# Altium PCB 20K Control Board V1.1.PcbDoc (part 1 of 24)
Units mm, origin at the board's own origin, x right, y up, seen from the top; angles counter-clockwise.
Board outline 132 x 260 mm, 4 copper layers (Top Layer, GND, VCC, Bottom Layer); 1384 components, 779 nets, 4515 pads, 1774 vias.
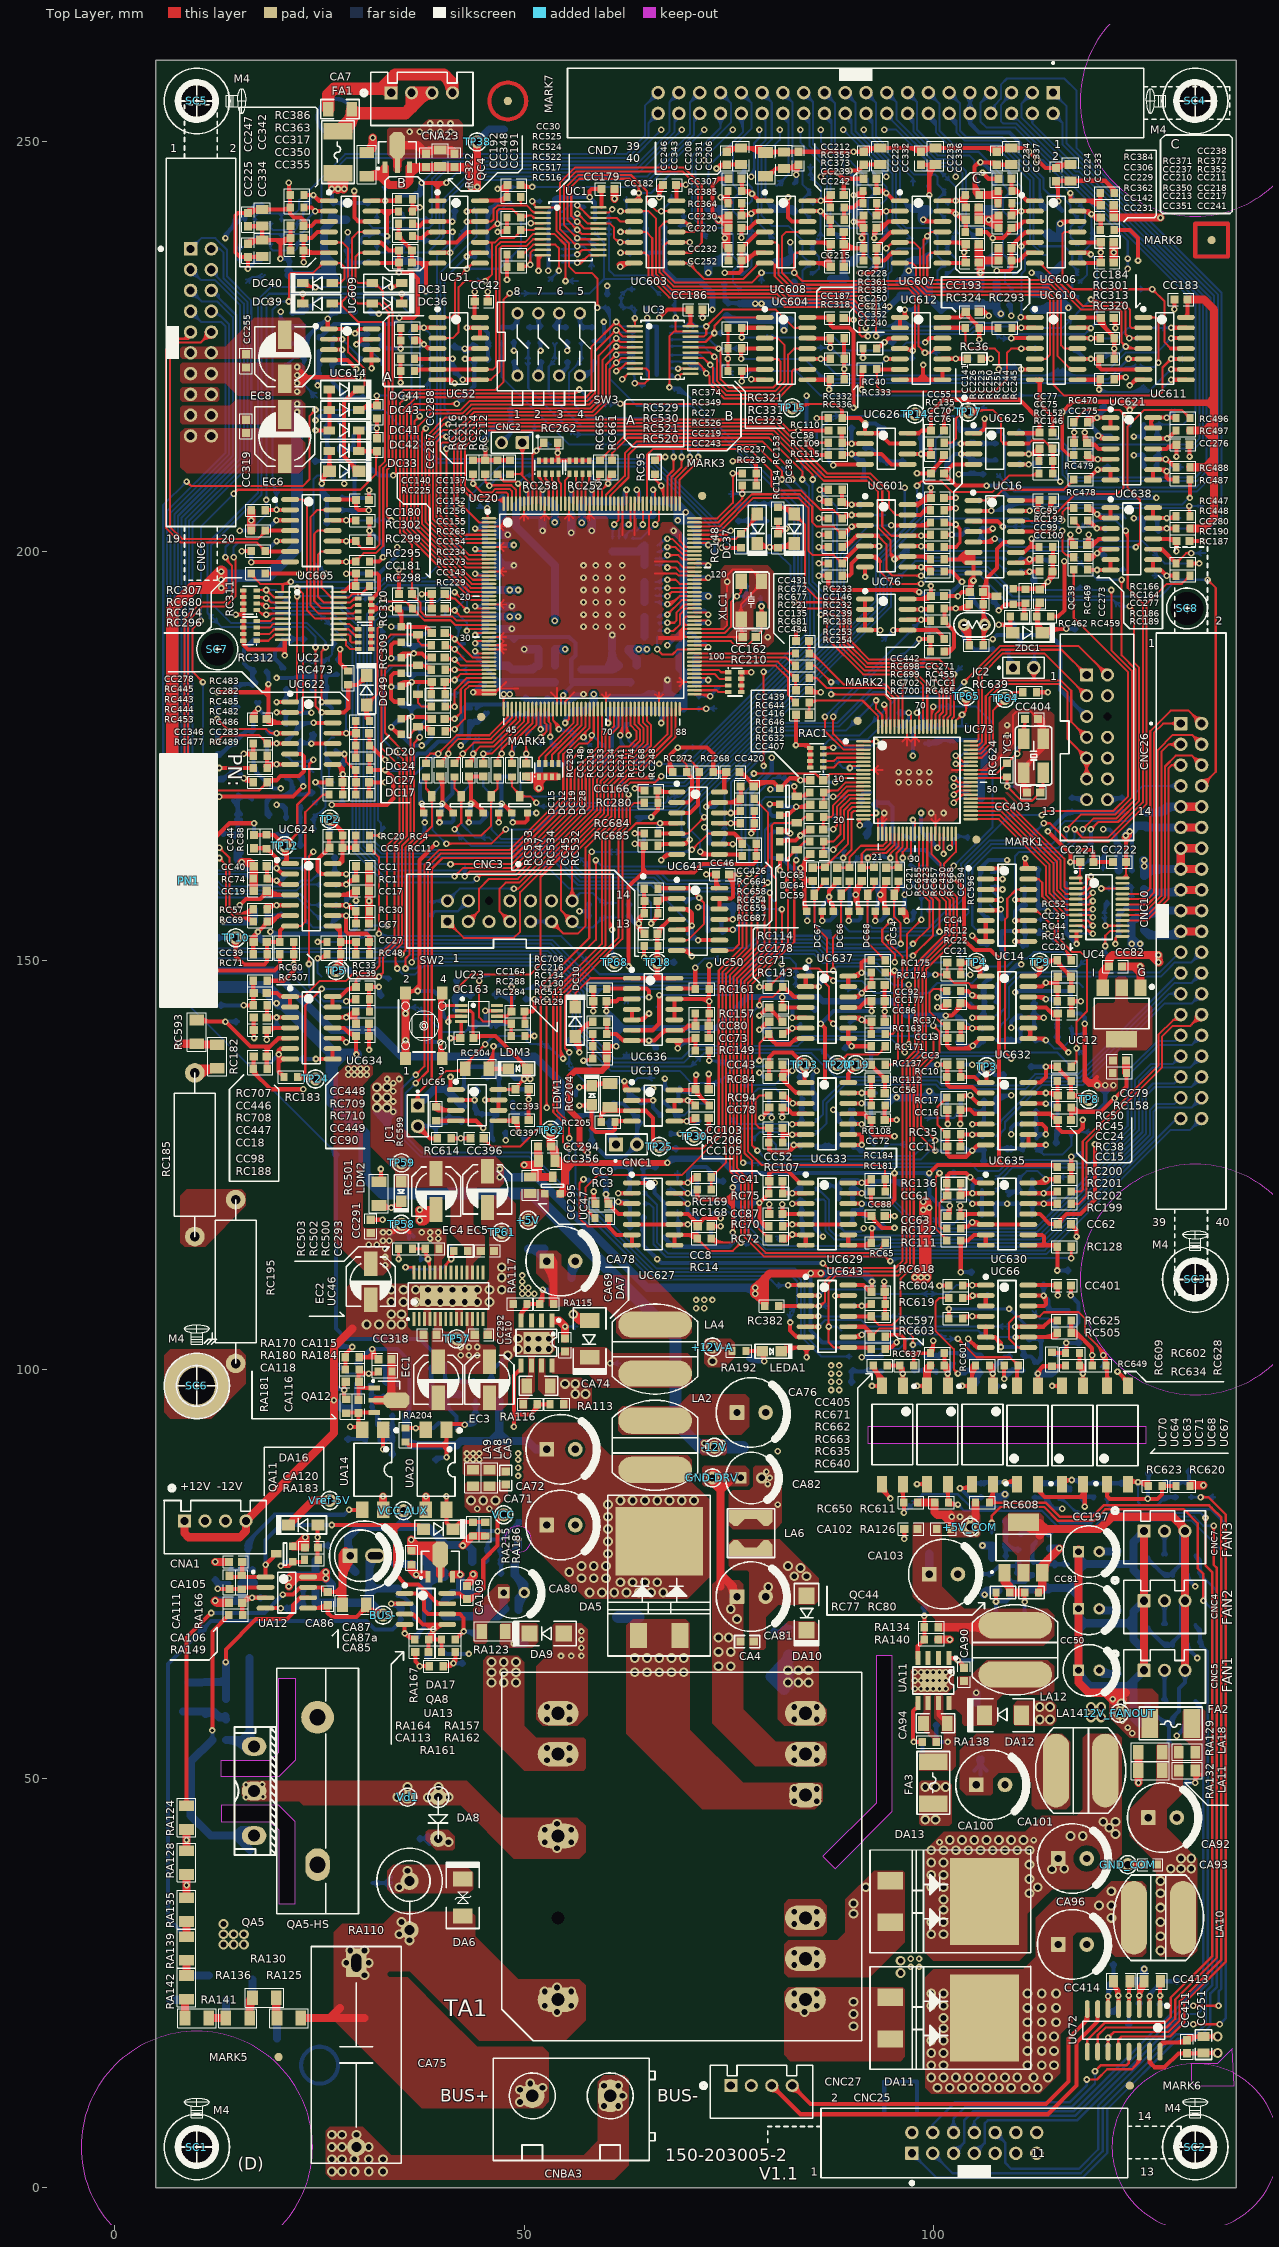
[diagram p0: Top Layer view]
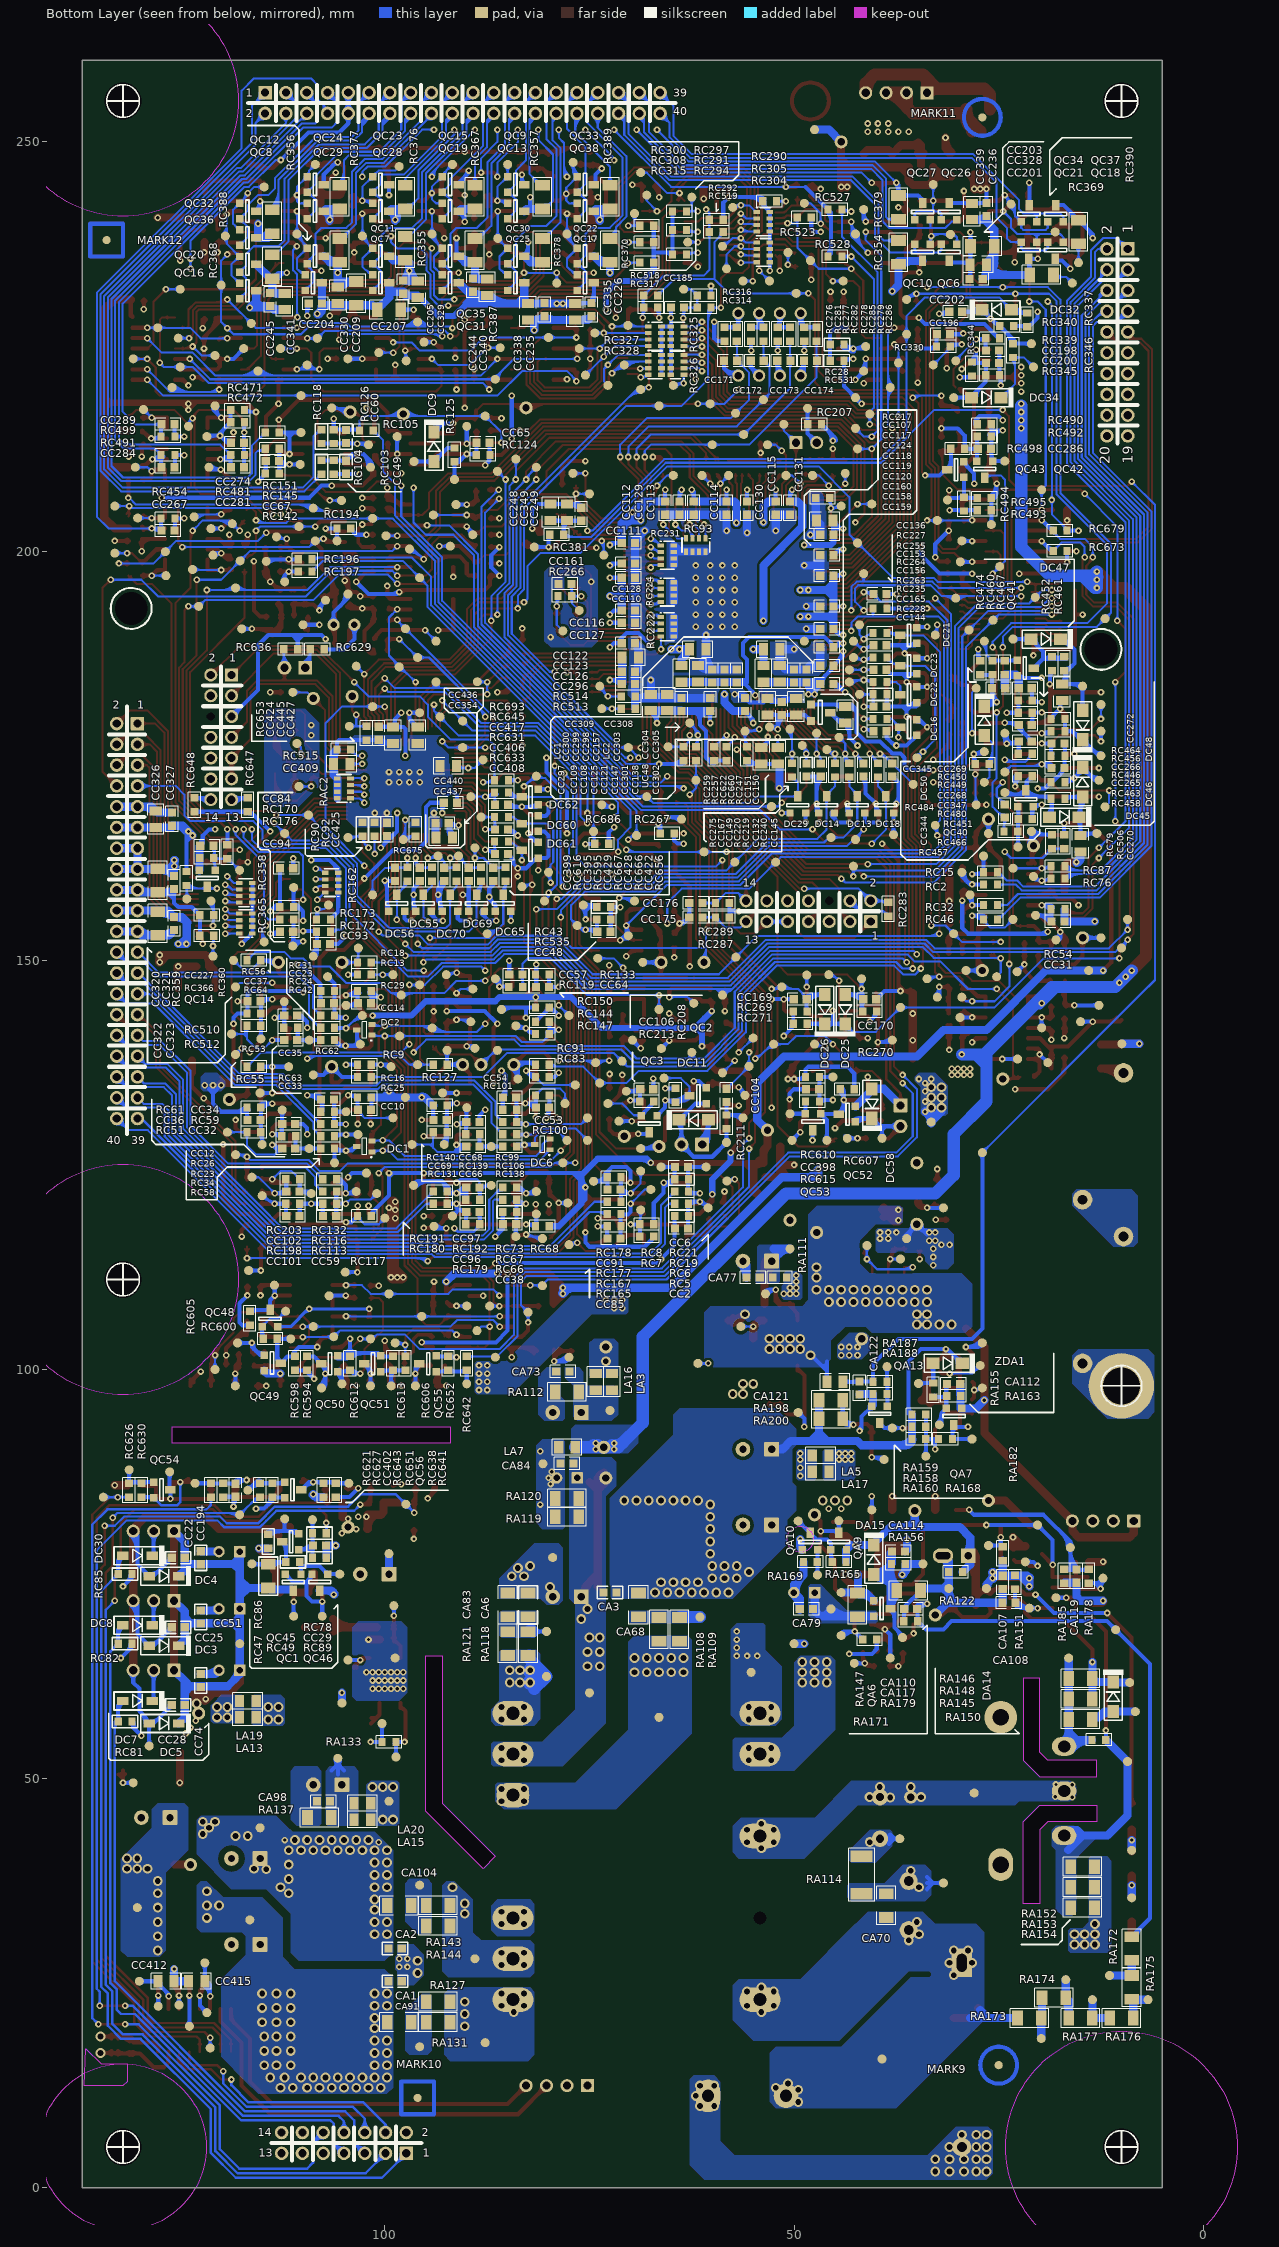
[diagram p1: Bottom Layer view, seen from below]
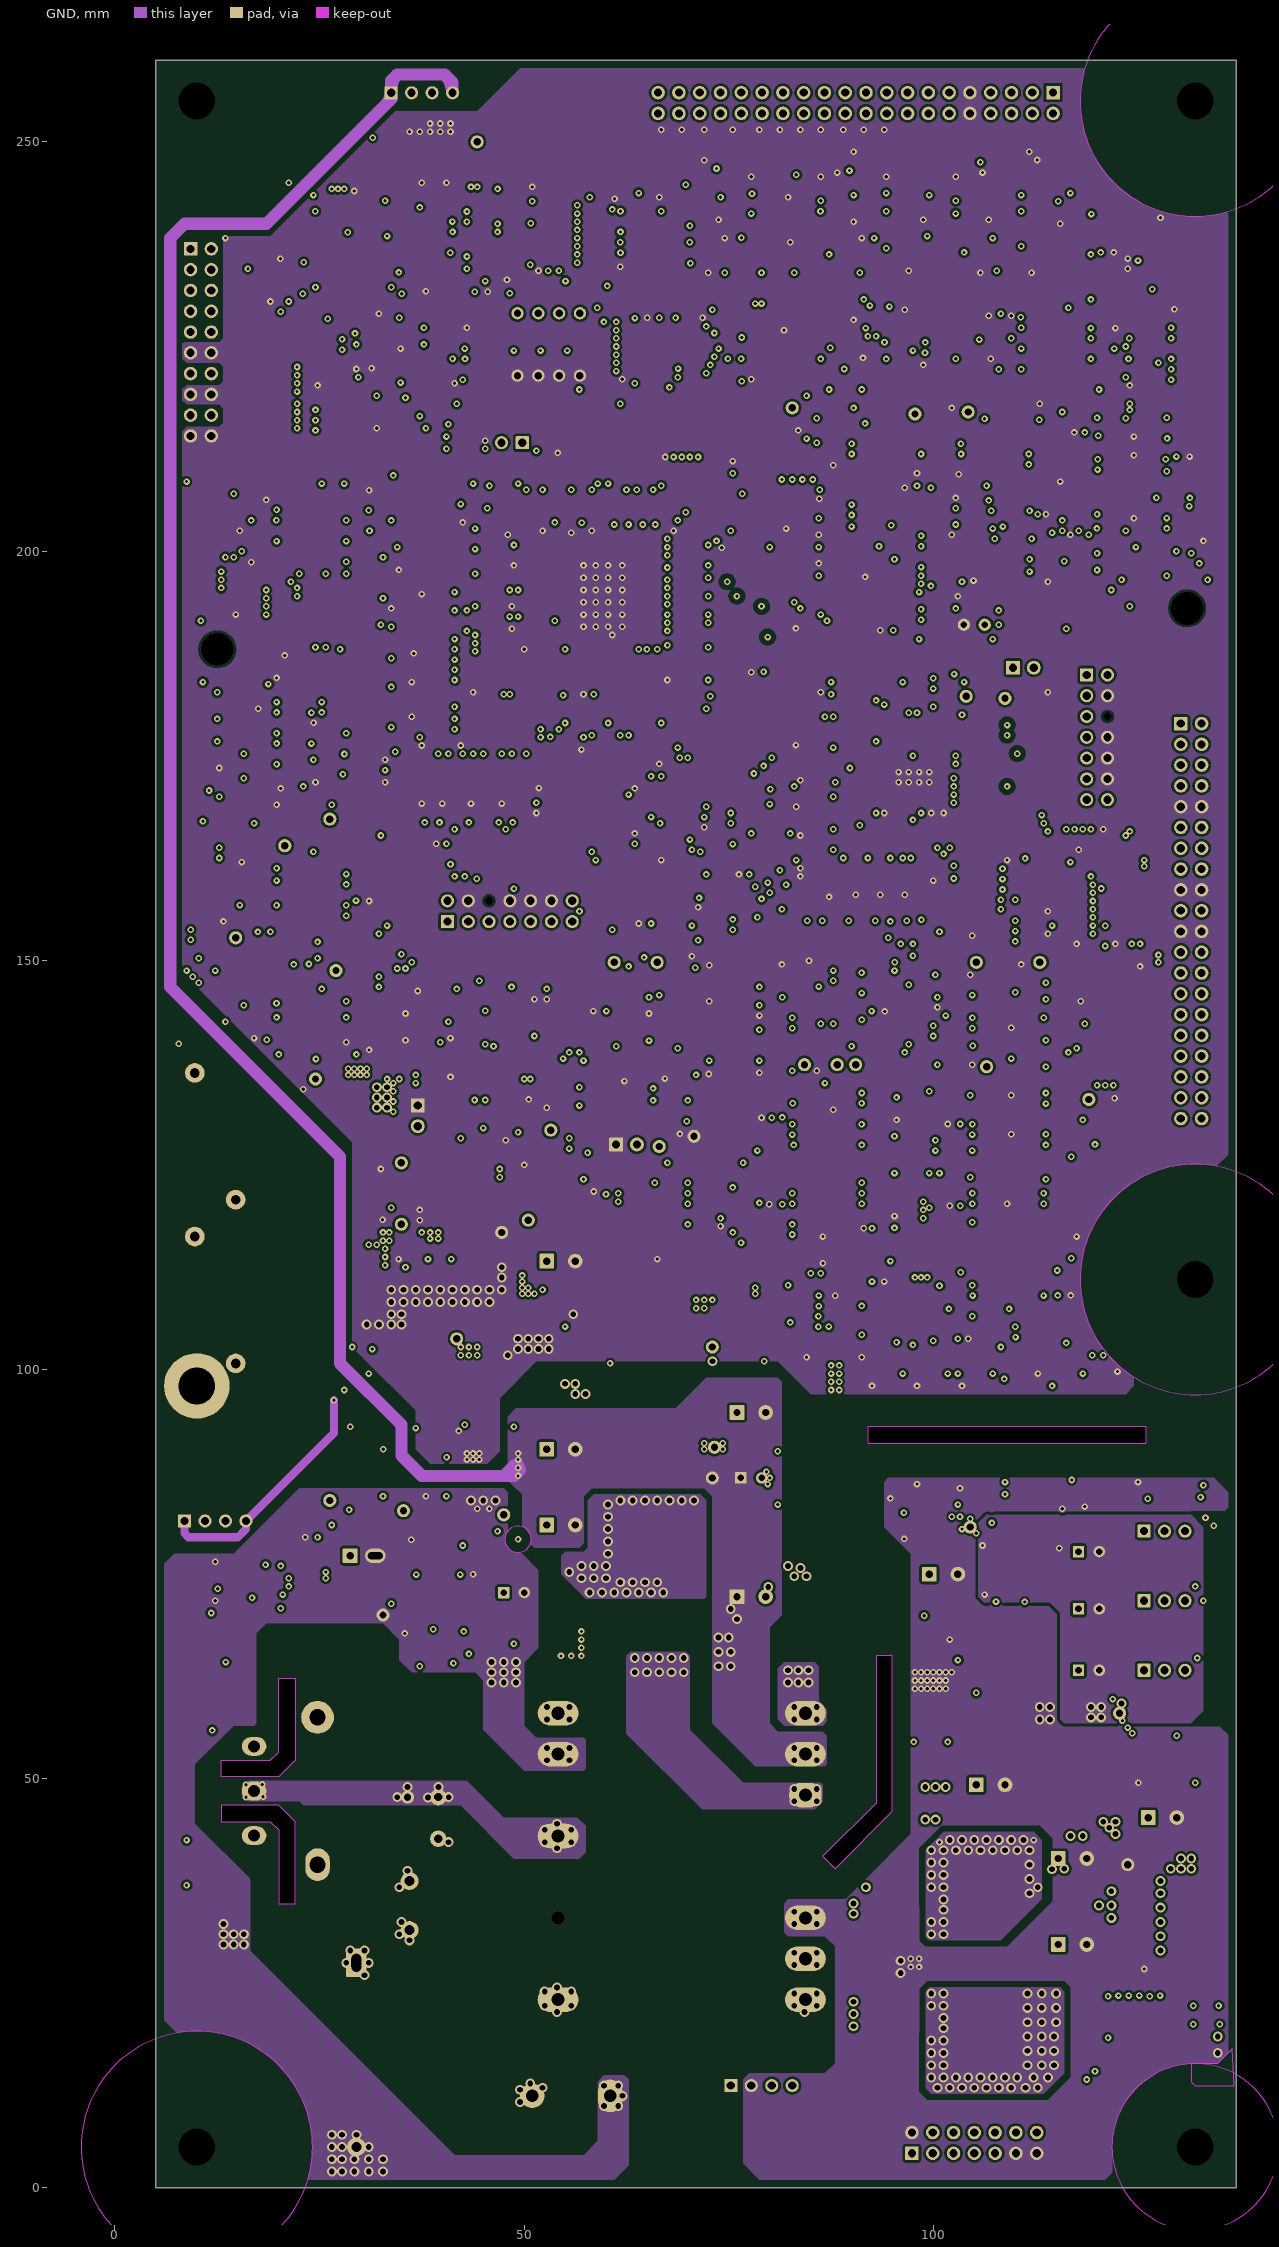
[diagram p2: GND]
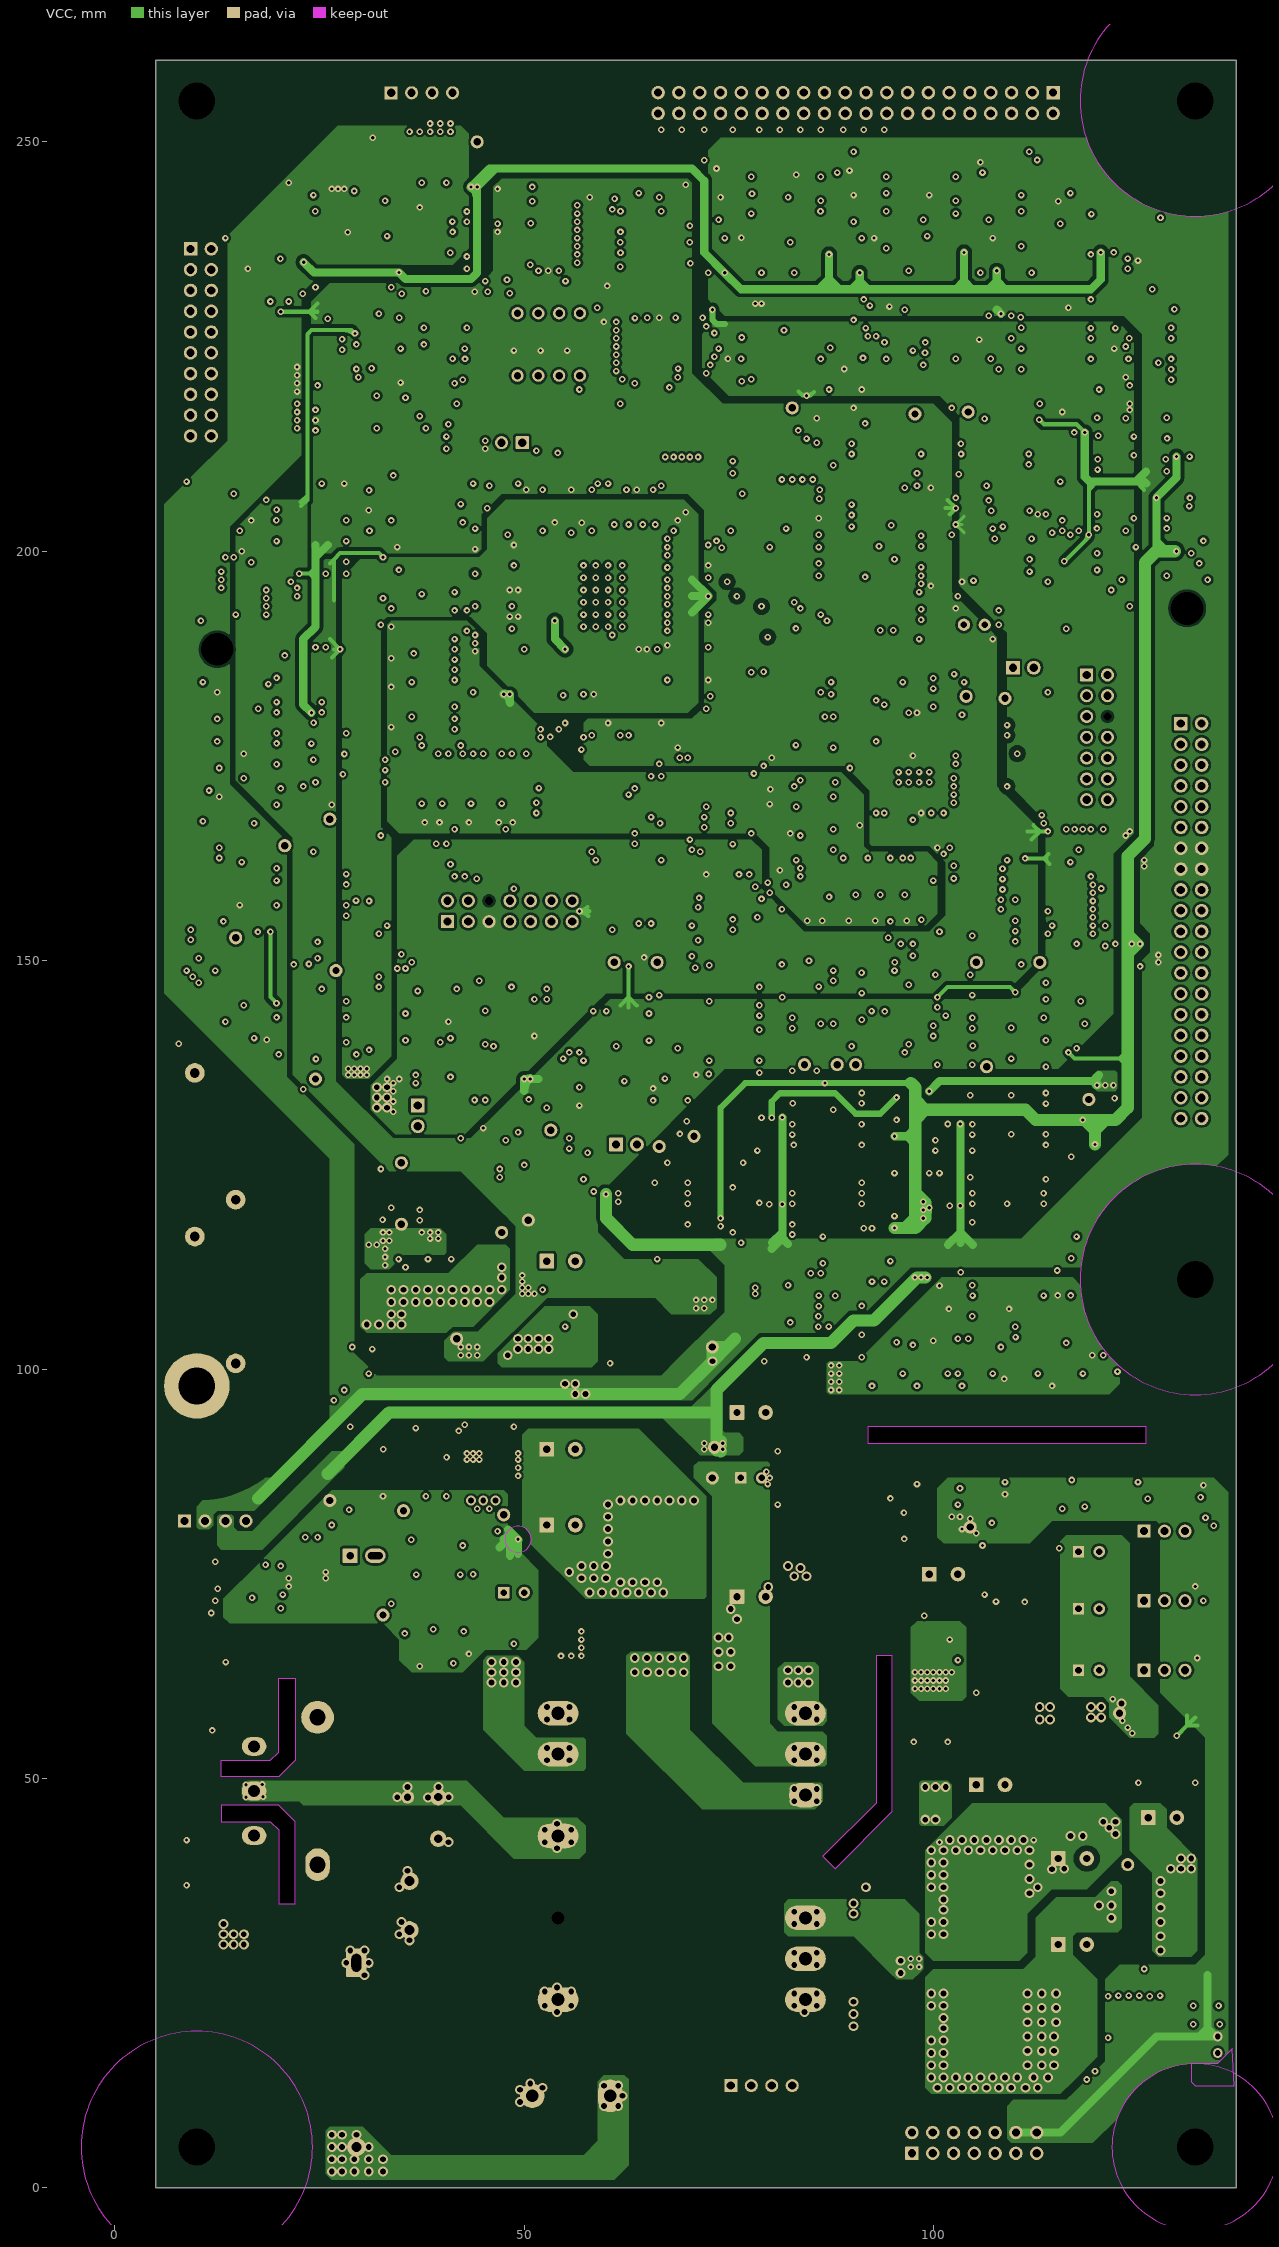
[diagram p3: VCC]

## Layer stack, top to bottom
Top Layer: signal copper 0.0356
Dielectric: core 0.32, FR-4, Dk 4.8
GND: signal copper 0.0356
Dielectric: prepreg 0.32, FR-4, Dk 4.8
VCC: signal copper 0.0356
Dielectric: core 0.32, FR-4, Dk 4.8
Bottom Layer: signal copper 0.0356

## Board outline
137,0 137,260 5,260 5,0
cut-out: 92,91 126,91 126,93 92,93
cut-out: 86.5,40.5 88,39 95,46 95,65 93,65 93,47
cut-out: 13,44.75 19,44.75 20,43.75 20,34.75 22,34.75 22,44.75 20,46.75 13,46.75
cut-out: 13,50.25 13,52.25 19,52.25 20,53.25 20,62.25 22,62.25 22,52.25 20,50.25

## Design rules (kind name [scope] priority, off if disabled: settings)
AssemblyTestpoint [(IsPad And (OnTopLayer Or OnBottomLayer))] p1: testpointundercomponent=FALSE minsize=1.1 maxsize=1.1 preferedsize=1.1 minholesize=1.1 maxholesize=1.1 preferedholesize=1.1 testpointgrid=0.025 usegrid=FALSE gridtolerance=0 allowsidebottom=TRUE minspacing=2.5
Clearance GND [(OnLayer('GND'))  AND InPolygon vs InPolygon] p1: gap=0.4
Clearance BOT [(OnLayer('Botlayer'))  AND InPolygon vs (istrack) or (ispad)] p2: gap=0.5
Clearance TOP [(OnLayer('Toplayer'))  AND InPolygon vs (IsTrack)  OR (IsPAD)] p3: gap=0.5
Clearance VCC [(OnLayer('VCC'))  AND InPolygon vs (IsTrack)  or InPolygon] p4: gap=0.5
Clearance "InPolygon  -PAD" [InPolygon vs (IsPad)  or  (IsTrack)] p5: gap=0.3
Clearance BUS+&BUS- [InNet('BUS+') vs InNet('BUS-')] p6: gap=5.5
Clearance InPolygon [InPolygon] p7: gap=0.3
Clearance ALL&ALL [All] p8: gap=0.2
ComponentClearance [All] p1: gap=0.254 collisioncheckmode=3 verticalgap=0.001 showdistances=FALSE
FabricationTestpoint [(IsPad And (OnTopLayer Or OnBottomLayer))] p1: side=2 testpointundercomponent=FALSE minsize=1.1 maxsize=1.1 preferedsize=1.1 minholesize=0 maxholesize=1.016 preferedholesize=0.813 testpointgrid=0.025 allowsidebottom=TRUE usegrid=FALSE gridtolerance=0 minspacing=2.5
Height [All] p1: minheight=0 maxheight=100 prefheight=12.7
HoleSize [All] p1: absolutevalues=TRUE maxlimit=10 minlimit=0 maxpercent=80.000 minpercent=20.000
HoleToHoleClearance [All] p1 off: gap=0.3 allowstackedmicrovias=TRUE
MinimumSolderMaskSliver [All] p1: minsoldermaskwidth=0
PlaneConnect PlaneConnect_2 [All] p1: planeconnectstyle=Relief reliefexpansion=0.508 reliefentries=4 reliefconductorwidth=0.254 reliefairgap=0.254
PolygonConnect PolygonConnect_1 [ispad] p1: connectstyle=Direct reliefconductorwidth=1 reliefentries=4 polygonreliefangle="90 Angle"
PolygonConnect [isvia] p2: connectstyle=Direct reliefconductorwidth=0.254 reliefentries=2 polygonreliefangle="90 Angle"
RoutingVias [All] p1: holewidth=0.4 width=0.8 viastyle="Through Hole" minholewidth=0.4 minwidth=0.8 maxholewidth=2 maxwidth=3
SilkToSilkClearance [All] p1: silktosilkclearance=0
SilkscreenOverComponentPads [All] p1: minsilkscreentomaskgap=0
SolderMaskExpansion [All] p1: expansion=0.102
Width [All] p1: maxlimit=20 minlimit=0.25 preferedwidth=0.3
18 further rules are at their usual default settings.

## Classes and differential pairs
component class "DC SPS": 12V_FANOUT +5V +5V_COM +12V-A -12V BUS- CA1 CA2 CA3 CA4 CA5 CA6 CA7 CA68 CA69 CA70 CA71 CA72 CA73 CA74 CA75 CA76 CA77 CA78 CA79 CA80 CA81 CA82 CA83 CA84 CA85 CA86 CA87 CA87a CA90 CA91 CA92 CA93 CA94 CA96 CA98 CA100 CA101 CA102 CA103 CA104 CA105 CA106 CA107 CA108 CA109 CA110 CA111 CA112 CA113 CA114 CA115 CA116 CA117 CA118 CA119 CA120 CA121 CA122 CC22 CC25 CC28 CC29 CC50 CC51 CC74 CC81 CC194 CC197 CNA1 CNA23 CNBA3 CNC4 CNC5 CNC7 DA5 DA6 DA7 DA8 DA9 DA10 DA11 DA12 DA13 DA14 DA15 DA16 DA17 DC3 DC4 DC5 DC7 DC8 DC30 FA1 FA2 FA3 GND-DRV GND_COM LA2 LA3 LA4 LA5 LA6 LA7 LA8 LA9 LA10 LA11 LA12 LA13 LA14 LA15 LA16 LA17 LA18 LA19 LA20 LEDA1 QA5 QA5-HS QA6 QA7 QA8 QA9 QA10 QA11 QA12 QA13 QC1 QC44 QC45 QC46 RA108 RA109 RA110 RA111 RA112 RA113 RA114 RA115 RA116 RA117 RA118 RA119 RA120 RA121 RA122 RA123 RA124 RA125 RA126 RA127 RA128 RA129 RA130 RA131 RA132 RA133 RA134 RA135 RA136 RA137 RA138 RA139 RA140 RA141 RA142 RA143 RA144 RA145 RA146 RA147 RA148 RA149 RA150 RA151 RA152 RA153 RA154 RA155 RA156 RA157 RA158 RA159 RA160 RA161 RA162 RA163 RA164 RA165 RA166 RA167 RA168 RA169 RA170 RA171 RA172 RA173 RA174 RA175 RA176 RA177 RA178 RA179 RA180 RA181 RA182 RA183 RA184 RA185 RA186 RA187 RA188 RA192 RA198 RA200 RA204 RA215 RC47 RC49 RC77 RC78 RC80 RC81 RC82 RC85 RC86 RC89 TA1 UA10 UA11 UA12 UA13 UA14 UA20 VCC VCC-AUX Vd1 Vref-5V ZDA1
component class AD: CC1 CC2 CC3 CC4 CC5 CC6 CC7 CC8 CC9 CC10 CC11 CC12 CC13 CC14 CC15 CC16 CC17 CC18 CC19 CC20 CC21 CC23 CC24 CC26 CC27 CC31 CC32 CC33 CC34 CC35 CC36 CC37 CC38 CC39 CC40 CC41 CC43 CC44 CC45 CC46 CC47 CC48 CC49 CC52 CC53 CC54 CC55 CC56 CC57 CC58 CC59 CC60 CC61 CC62 CC63 CC64 CC65 CC66 CC67 CC68 CC69 CC70 CC71 CC72 CC73 CC75 CC76 CC77 CC78 CC79 CC80 CC82 CC84 CC85 CC86 CC87 CC88 CC90 CC91 CC92 CC93 CC94 CC95 CC96 CC97 CC98 CC99 CC100 CC101 CC102 CC177 CC178 CC216 CC277 CC280 CC446 CC447 CC448 CC449 DC1 DC2 DC6 DC9 DC10 RC1 RC2 RC3 RC4 RC5 RC6 RC7 RC8 RC9 RC10 RC11 RC12 RC13 RC14 RC15 RC16 RC17 RC18 RC19 RC20 RC21 RC22 RC23 RC24 RC25 RC26 RC29 RC30 RC31 RC32 RC33 RC34 RC35 RC37 RC38 RC39 RC41 RC42 RC43 RC44 RC45 RC46 RC48 RC50 RC51 RC52 RC53 RC54 RC55 RC56 RC57 RC58 RC59 RC60 RC61 RC62 RC63 RC64 RC65 RC66 RC67 RC68 RC69 RC70 RC71 RC72 RC73 RC74 RC75 RC76 RC79 RC83 RC84 RC87 RC88 RC91 RC94 RC96 RC97 RC99 RC100 RC101 RC103 RC104 RC105 RC106 RC107 RC108 RC109 RC110 RC111 RC112 RC113 RC114 RC115 RC116 RC117 RC118 RC119 RC122 RC124 RC125 RC126 RC127 RC128 RC129 RC130 RC131 RC132 RC133 RC134 RC135 RC136 RC137 RC138 RC139 RC140 RC142 RC143 RC144 RC145 RC146 RC147 RC149 RC150 RC151 RC152 RC157 RC158 RC161 RC162 RC163 RC164 RC165 RC166 RC167 RC168 RC169 RC170 RC171 RC172 RC173 RC174 RC175 RC176 RC177 RC178 RC179 RC180 RC181 RC182 RC183 RC184 RC185 RC186 RC187 RC188 RC189 RC190 RC191 RC192 RC193 RC194 RC195 RC196 RC197 RC198 RC199 RC200 RC201 RC202 RC203 RC506 RC507 RC511 RC532 RC533 RC534 RC535 RC593 RC706 RC707 RC708 RC709 RC710 SC6 TP2 TP3 TP4 TP5 TP8 TP9 TP10 TP12 TP13 TP14 TP15 TP17 TP18 TP19 TP20 TP24 UC12 UC14 UC16 UC50 UC624 UC625 UC626 UC627 UC628 UC629 UC630 UC632 UC633 UC634 UC635 UC636 UC637 UC638
component class CPU-S: CC251 CC354 CC393 CC394 CC395 CC396 CC397 CC398 CC399 CC400 CC401 CC402 CC403 CC404 CC405 CC406 CC407 CC408 CC409 CC411 CC412 CC413 CC414 CC415 CC416 CC417 CC418 CC421 CC422 CC423 CC424 CC425 CC426 CC427 CC428 CC429 CC430 CC431 CC434 CC436 CC437 CC439 CC440 CC442 CC445 CNC25 CNC26 CNC27 DC54 DC55 DC56 DC57 DC58 DC59 DC60 DC61 DC62 DC63 DC64 DC65 DC66 DC67 DC68 DC69 DC70 EC10 JC1 JC2 LDM3 MARK1 MARK2 QC48 QC49 QC50 QC51 QC52 QC53 QC54 QC55 QC56 RAC1 RAC2 RC90 RC92 RC382 RC504 RC505 RC515 RC594 RC595 RC596 RC597 RC598 RC599 RC600 RC601 RC602 RC603 RC604 RC605 RC606 RC607 RC608 RC609 RC610 RC611 RC612 RC613 RC614 RC615 RC616 RC618 RC619 RC620 RC621 RC622 RC623 RC624 RC625 RC626 RC627 RC628 RC629 RC630 RC631 RC632 RC633 RC634 RC635 RC636 RC637 RC638 RC639 RC640 RC641 RC642 RC643 RC644 RC645 RC646 RC647 RC648 RC649 RC650 RC651 RC652 RC653 RC654 RC655 RC656 RC657 RC658 RC659 RC660 RC661 RC662 RC663 RC664 RC665 RC666 RC667 RC668 RC671 RC672 RC673 RC674 RC675 RC677 RC679 RC680 RC681 RC684 RC685 RC686 RC687 RC693 RC698 RC699 RC700 RC702 TP63 TP64 TP65 TP66 TP67 TP68 UC63 UC64 UC65 UC66 UC67 UC68 UC70 UC71 UC72 UC73 UC76 UC643 YC1
component class "CPU M": CC103 CC104 CC105 CC106 CC107 CC108 CC109 CC110 CC111 CC112 CC113 CC114 CC115 CC116 CC117 CC118 CC119 CC120 CC121 CC122 CC123 CC124 CC125 CC126 CC127 CC128 CC129 CC130 CC131 CC132 CC133 CC134 CC135 CC136 CC137 CC139 CC140 CC141 CC143 CC144 CC145 CC146 CC147 CC148 CC149 CC150 CC151 CC152 CC153 CC154 CC155 CC156 CC157 CC158 CC159 CC160 CC161 CC162 CC163 CC164 CC165 CC166 CC167 CC168 CC169 CC170 CC171 CC172 CC173 CC174 CC175 CC176 CC420 CNC1 CNC2 CNC3 DC11 DC12 DC13 DC14 DC15 DC16 DC17 DC18 DC19 DC20 DC21 DC22 DC23 DC24 DC25 DC26 DC27 DC28 DC29 LDM1 MARK3 MARK4 PN1 QC2 QC3 RC93 RC95 RC204 RC205 RC206 RC207 RC208 RC210 RC211 RC212 RC213 RC214 RC215 RC216 RC217 RC218 RC219 RC220 RC221 RC222 RC223 RC224 RC225 RC226 RC227 RC228 RC229 RC230 RC231 RC232 RC233 RC234 RC235 RC236 RC237 RC238 RC239 RC240 RC241 RC244 RC245 RC247 RC248 RC250 RC251 RC252 RC253 RC254 RC255 RC256 RC257 RC258 RC259 RC262 RC263 RC264 RC265 RC266 RC267 RC268 RC269 RC270 RC271 RC272 RC273 RC274 RC275 RC276 RC277 RC278 RC279 RC280 RC281 RC282 RC283 RC284 RC285 RC286 RC287 RC288 RC289 RC513 RC514 SW2 SW3 TP25 TP30 TP31 UC19 UC20 UC23 UC601 UC641 XLC1
component class Driver: CC30 CC42 CC142 CC179 CC180 CC181 CC182 CC183 CC184 CC185 CC186 CC187 CC191 CC192 CC193 CC196 CC198 CC200 CC201 CC202 CC203 CC204 CC205 CC206 CC207 CC208 CC209 CC210 CC211 CC212 CC213 CC214 CC215 CC217 CC218 CC219 CC220 CC221 CC222 CC223 CC224 CC225 CC226 CC227 CC228 CC229 CC230 CC231 CC232 CC233 CC234 CC235 CC236 CC237 CC238 CC239 CC240 CC241 CC242 CC243 CC244 CC245 CC246 CC247 CC248 CC249 CC250 CC252 CC306 CC307 CC317 CC328 CC329 CC330 CC331 CC332 CC333 CC334 CC335 CC336 CC337 CC338 CC339 CC340 CC341 CC342 CC343 CC348 CC349 CC350 CC351 CC352 CC355 DC31 DC32 DC34 DC36 DC37 DC38 DC39 DC40 QC4 QC6 QC7 QC8 QC9 QC10 QC11 QC12 QC13 QC14 QC15 QC16 QC17 QC18 QC19 QC20 QC21 QC22 QC23 QC24 QC25 QC26 QC27 QC28 QC29 QC30 QC31 QC32 QC33 QC34 QC35 QC36 QC37 QC38 RC27 RC28 RC36 RC40 RC148 RC153 RC154 RC290 RC291 RC292 RC293 RC294 RC295 RC296 RC297 RC298 RC299 RC300 RC301 RC302 RC304 RC305 RC307 RC308 RC309 RC310 RC311 RC312 RC313 RC314 RC315 RC316 RC317 RC318 RC320 RC321 RC322 RC323 RC324 RC325 RC326 RC327 RC328 RC330 RC331 RC332 RC333 RC336 RC337 RC339 RC340 RC344 RC345 RC346 RC349 RC350 RC352 RC353 RC354 RC355 RC356 RC357 RC358 RC359 RC360 RC361 RC362 RC363 RC364 RC365 RC366 RC367 RC368 RC369 RC370 RC371 RC372 RC373 RC374 RC376 RC377 RC378 RC379 RC381 RC383 RC384 RC385 RC386 RC387 RC388 RC389 RC390 RC510 RC512 RC516 RC517 RC518 RC519 RC520 RC521 RC522 RC523 RC524 RC525 RC526 RC527 RC528 RC529 RC530 RC531 TP38 UC1 UC2 UC3 UC4 UC51 UC52 UC603 UC604 UC605 UC606 UC607 UC608 UC609 UC610 UC611 UC612 UC614
component class IO: CC255 CC265 CC266 CC267 CC268 CC269 CC270 CC271 CC272 CC273 CC274 CC275 CC276 CC278 CC281 CC282 CC283 CC284 CC286 CC287 CC288 CC289 CC319 CC320 CC321 CC322 CC323 CC326 CC327 CC344 CC345 CC346 CC347 CNC6 CNC10 CNC11 CNC121 CND7 DC33 DC41 DC42 DC43 DC44 DC45 DC46 DC47 DC48 DC49 DC50 EC6 EC8 MARK5 MARK6 MARK7 MARK8 MARK9 MARK10 MARK11 MARK12 NTCC1 NTCM1 QC39 QC40 QC41 QC42 QC43 RC443 RC444 RC445 RC446 RC447 RC448 RC449 RC450 RC451 RC452 RC453 RC454 RC455 RC456 RC457 RC458 RC459 RC460 RC461 RC462 RC463 RC464 RC465 RC466 RC467 RC469 RC470 RC471 RC472 RC473 RC474 RC477 RC478 RC479 RC480 RC481 RC482 RC483 RC484 RC485 RC486 RC487 RC488 RC489 RC490 RC491 RC492 RC493 RC494 RC495 RC496 RC497 RC498 RC499 SC1 SC2 SC3 SC4 SC5 SC7 SC8 UC621 UC622 ZDC1
component class Power: CC138 CC291 CC292 CC293 CC294 CC295 CC296 CC297 CC298 CC299 CC300 CC301 CC302 CC303 CC304 CC305 CC308 CC309 CC318 CC356 EC1 EC2 EC3 EC4 EC5 LC1 LC2 LDM2 RC500 RC501 RC502 RC503 TP57 TP58 TP59 TP61 TP62 UC46 UC47 UC48

## Components (designator, comment, footprint, x,y, rotation, side; value= is the part's Value field where it differs from the comment)
12V_FANOUT "NC" TEST-12 122.75,58 r90 top locked
+5V "NC" TEST-12 50.5,118.25 r180 top locked
+5V_COM "NC" TEST-12 104.5,80.75 r180 top locked
+12V-A "NC" TEST-12 73,102.75 r90 top locked
-12V "NC" TEST-12 73.25,90.5 r90 top locked
BUS- "NC" TEST-12 32.75,70 r270 top locked
CA1 "023-105220-0" C0603SM 98.75,25.25 r0 bottom locked
CA2 "023-105220-0" C0603SM 98.75,29.25 r180 bottom locked
CA3 "023-105220-0" C0603SM 72.5,72.75 r180 bottom locked
CA4 "023-105220-0" C0603SM 77.25,66.75 r180 top locked
CA5 "023-472220-0" C0603SM 47.75,86.75 r90 top locked
CA6 "023-221250-0" C1206SM 82.5,71.25 r90 bottom locked
CA7 "023-106350-0" C1206SM 27.5,254 r0 top locked
CA68 "023-221250-0" CC3216-1206 69,71.25 r90 bottom locked
CA69 "023-103220-0" CC1608-0603 55,103 r270 top locked
CA70 "023-472350-0" CC3216-1206 38.75,34.5 r270 bottom locked
CA71 "020-337100-0" EC3.5/8.5#1 54.5,81 r180 top locked
CA72 "020-337100-0" EC3.5/8.5#1 54.5,90.25 r180 top locked
CA73 "023-105220-0" CC1608-0603 78.25,99.75 r180 bottom locked
CA74 "023-106350-0" C1206SM 51.75,98 r0 top locked
CA75 "022-104001-0" PC104/1600V-22.5 29.5,16.25 r90 top locked
CA76 "020-337100-0" EC3.5/8.5#1 77.75,94.75 r180 top locked
CA77 "023-105220-0" CC1608-0603 55,111.25 r180 bottom locked
CA78 "020-337100-0" EC3.5/8.5#1 54.5,113.25 r180 top locked
CA79 "023-105220-0" CC1608-0603 48.5,70.75 r0 bottom locked
CA80 "020-157111-0" EC2.54/6.3#1 48.75,72.75 r180 top locked
CA81 "020-337100-0" EC3.5/8.5#1 77.75,72.25 r180 top locked (schematic designator CA76)
CA82 "020-157111-0" EC2.54/6.3#1 77.75,86.75 r180 top locked
CA83 "023-221250-0" CC3216-1206 85,71.25 r90 bottom locked
CA84 "023-105220-0" CC1608-0603 77.75,88.5 r180 bottom locked
CA85 "023-105250-0" CC3216-1206 29.25,71.25 r0 top locked
CA86 "023-105220-0" CC1608-0603 26,72 r270 top locked
CA87 "NC" EC2.54/6.3#2 30,77.25 r180 top locked
CA87a "020-337100-0" EC3.5/8.5#2 30.48,77.25 r180 top locked (schematic designator CA71)
CA90 "023-103220-0" CC1608-0603 103.75,62.75 r270 top locked
CA91 "023-221250-0" CC3216-1206 98.25,20.25 r0 bottom locked
CA92 "020-337100-0" EC3.5/8.5#1 128,45.25 r180 top locked
CA93 "023-105220-0" CC1608-0603 126.5,39.5 r0 top locked
CA94 "023-106350-0" C1206SM 100.25,56.75 r0 top locked
CA96 "020-337100-0" EC3.5/8.5#1 117,29.75 r180 top locked
CA98 "023-105220-0" CC1608-0603 107.5,47.25 r0 bottom locked
CA100 "020-337100-0" EC3.5/8.5#1 107,49.25 r180 top locked
CA101 "020-337100-0" EC3.5/8.5#1 117,40.25 r180 top locked
CA102 "023-105220-0" CC1608-0603 97.25,80.5 r0 top locked
CA103 "020-337100-0" EC3.5/8.5#1 101.25,75 r180 top locked
CA104 "023-221250-0" CC3216-1206 98.25,34.5 r0 bottom locked
CA105 "NC" CC1608-0603 14.75,76.5 r0 top locked
CA106 "023-471220-0" CC1608-0603 14.75,71.5 r0 top locked
CA107 "023-105220-0" CC1608-0603 24.5,74 r270 bottom locked
CA108 "023-471220-0" CC1608-0603 23.75,71.5 r180 bottom locked
CA109 "023-105220-0" CC1608-0603 43,72.75 r270 top locked
CA110 "023-106350-0" CC3216-1206 36,73 r0 bottom locked
CA111 "023-472220-0" CC1608-0603 14,74 r90 top locked
CA112 "023-105220-0" CC1608-0603 30.5,98.25 r0 bottom locked
CA113 "023-102220-0" CC1608-0603 37.5,65.5 r0 top locked
CA114 "023-105220-0" CC1608-0603 37.25,77.75 r0 bottom locked
CA115 "023-105220-0" CC1608-0603 33,101.25 r180 top locked
CA116 "023-562220-0" CC1608-0603 29.75,95.5 r270 top locked
CA117 "023-105220-0" CC1608-0603 35.75,70.75 r180 bottom locked
CA118 "023-105220-0" CC1608-0603 29,98.5 r180 top locked
CA119 "023-472220-0" CC1608-0603 15.5,74.75 r90 bottom locked
CA120 "NC" CC1608-0603 24,78.25 r0 top locked
CA121 "023-225330-0" CC2012-0805 45,98.5 r180 bottom locked
CA122 "023-105220-0" CC1608-0603 42,97.75 r90 bottom locked
CC1 "023-221220-0" CC1608-0603 30.25,161.5 r180 top locked
CC2 "023-221220-0" CC1608-0603 63.75,117.25 r180 bottom locked
CC3 "023-221220-0" CC1608-0603 102.5,137.25 r180 top locked
CC4 "023-221220-0" CC1608-0603 102.5,149.75 r180 top locked
CC5 "023-221220-0" CC1608-0603 27,163.75 r180 top locked
CC6 "023-221220-0" CC1608-0603 63.75,124.75 r180 bottom locked
CC7 "023-221220-0" CC1608-0603 30.25,154.5 r180 top locked
CC8 "023-105220-0" CC1608-0603 72,117.5 r0 top locked
CC9 "023-105220-0" CC1608-0603 59.5,120.25 r180 top locked
CC10 "023-221220-0" CC1608-0603 102.5,131.75 r180 bottom locked
CC11 "023-220220-0" CC1608-0603 102.5,127.25 r0 top locked
CC12 "023-220220-0" CC1608-0603 107,133 r0 bottom locked
CC13 "023-220220-0" CC1608-0603 102.5,140.5 r0 top locked
CC14 "023-221220-0" CC1608-0603 102.5,144.75 r180 bottom locked
CC15 "023-105220-0" CC1608-0603 116,130.5 r0 top locked
CC16 "023-105220-0" CC1608-0603 102.5,131.75 r180 top locked
CC17 "023-105220-0" CC1608-0603 30.25,158.5 r0 top locked
CC18 "023-105220-0" CC1608-0603 17.75,141.5 r180 top locked
CC19 "023-105220-0" CC1608-0603 17.75,158.5 r0 top locked
CC20 "023-105220-0" CC1608-0603 116,143.5 r0 top locked
CC21 "023-105220-0" CC1608-0603 102.5,144.75 r180 top locked
CC22 "023-105220-0" C0603SM 125.25,77 r0 bottom locked
CC23 "023-220220-0" CC1608-0603 107,144.75 r0 bottom locked
CC24 "023-221220-0" CC1608-0603 116,133.5 r180 top locked
CC25 "023-105220-0" C0603SM 125.25,68.5 r0 bottom locked
CC26 "023-221220-0" CC1608-0603 116,148 r0 top locked
CC27 "023-221220-0" CC1608-0603 30.25,152.25 r0 top locked
CC28 "023-105220-0" C0603SM 125.25,59 r0 bottom locked
CC29 "023-105220-0" C0603SM 108,78.5 r0 bottom locked
CC30 "023-105220-0" CC1608-0603 48.75,244.75 r180 top locked
CC31 "023-220220-0" CC1608-0603 17.75,154.75 r180 bottom locked
CC32 "023-105220-0" CC1608-0603 111.75,127 r180 bottom locked
CC33 "023-105220-0" CC1608-0603 111.5,140.25 r180 bottom locked
CC34 "023-105220-0" CC1608-0603 111.75,130 r180 bottom locked
CC35 "023-105220-0" CC1608-0603 111.5,143.25 r180 bottom locked
CC36 "023-221220-0" CC1608-0603 116,130.5 r0 bottom locked
CC37 "023-221220-0" CC1608-0603 116,145 r0 bottom locked
CC38 "023-221220-0" CC1608-0603 84.75,117.75 r180 bottom locked
CC39 "023-220220-0" CC1608-0603 17.75,152.25 r180 top locked
CC40 "023-220220-0" CC1608-0603 17.75,161.5 r180 top locked
CC41 "023-221220-0" CC1608-0603 80.75,123 r0 top locked
CC42 "023-105220-0" CC1608-0603 44.75,230.5 r0 top locked
CC43 "023-221220-0" CC1608-0603 80.75,137.25 r0 top locked
CC44 "023-220220-0" CC1608-0603 17,164.5 r90 top locked
CC45 "023-102220-0" C0603SM 65.5,153.25 r0 top locked
CC46 "023-105220-0" CC1608-0603 74.25,160.5 r0 top locked
CC47 "023-102220-0" CC1608-0603 65.5,157.25 r0 top locked
CC48 "023-221220-0" CC1608-0603 73.25,153.5 r180 bottom locked
CC49 "023-103220-0" C0603SM 104.75,210.25 r90 bottom locked
CC50 "020-157111-0" EC2.54/6.3#1 119,63.25 r180 top locked (schematic designator CA81)
CC51 "023-105220-0" C0603SM 122.5,69.75 r270 bottom locked
CC52 "023-220220-0" CC1608-0603 80.75,129.5 r0 top locked
CC53 "023-221220-0" CC1608-0603 80.75,132 r180 bottom locked
CC54 "023-220220-0" CC1608-0603 84.75,133.25 r0 bottom locked
CC55 "023-105220-0" CC1608-0603 100.5,214.75 r180 top locked
CC56 "023-221220-0" CC1608-0603 93.25,133.75 r180 top locked
CC57 "023-101220-0" CC1608-0603 84,148.25 r180 bottom locked
CC58 "023-471220-0" CC1608-0603 88,214.75 r0 top locked
CC59 "023-221220-0" CC1608-0603 106.75,118.75 r180 bottom locked
CC60 "023-103220-0" C0603SM 104.75,214 r90 bottom locked
CC61 "023-221220-0" CC1608-0603 102.5,121.25 r0 top locked
CC62 "023-105220-0" CC1608-0603 116,117.75 r0 top locked
CC63 "023-105220-0" CC1608-0603 102.5,118.75 r180 top locked
CC64 "023-102220-0" CC1608-0603 80.75,146.75 r180 bottom locked
CC65 "023-105220-0" CC1608-0603 88,213.25 r0 bottom locked
CC66 "023-105220-0" CC1608-0603 89.25,127.25 r180 bottom locked
CC67 "023-103220-0" C0603SM 113.75,211 r180 bottom locked
CC68 "023-105220-0" CC1608-0603 89.25,130.25 r180 bottom locked
CC69 "023-221220-0" CC1608-0603 93.25,130.5 r0 bottom locked
CC70 "023-471220-0" CC1608-0603 100.5,211.75 r0 top locked
CC71 "023-102220-0" CC1608-0603 80.75,142.5 r0 top locked
CC72 "023-105220-0" CC1608-0603 93.25,130.5 r180 top locked
CC73 "023-101220-0" CC1608-0603 71.75,140.5 r180 top locked
CC74 "023-105220-0" C0603SM 122.5,62 r270 bottom locked
CC75 "023-103220-0" C0603SM 113.75,212.5 r0 top locked
CC76 "023-105220-0" CC1608-0603 100.5,209.5 r180 top locked
CC77 "023-105220-0" CC1608-0603 113.75,214.5 r0 top locked
CC78 "023-105220-0" CC1608-0603 80.75,132 r0 top locked
CC79 "023-105220-0" CC1608-0603 122.75,137.75 r0 top locked
CC80 "023-105220-0" CC1608-0603 71.75,142 r0 top locked
CC81 "020-157111-0" EC2.54/6.3#1 119,70.75 r180 top locked (schematic designator CA81)
CC82 "023-105220-0" CC1608-0603 122.25,149.25 r0 top locked
CC84 "023-105220-0" CC1608-0603 112,161.25 r180 bottom locked
CC85 "023-221220-0" CC1608-0603 72,116 r180 bottom locked
CC86 "023-221220-0" CC1608-0603 93.25,142.5 r180 top locked
CC87 "023-105220-0" CC1608-0603 80.75,119 r180 top locked
CC88 "023-105220-0" CC1608-0603 93.25,118.75 r0 top locked
CC90 "023-105220-0" CC1608-0603 30.25,140.75 r180 top locked
CC91 "023-221220-0" CC1608-0603 72,122 r0 bottom locked
CC92 "023-221220-0" CC1608-0603 93.25,147 r180 top locked
CC93 "NC" CC1608-0603 107.5,152 r0 bottom locked
CC94 "NC" CC1608-0603 112,153.5 r180 bottom locked
CC95 "023-105220-0" CC1608-0603 113.75,206.25 r180 top locked
CC96 "023-221220-0" CC1608-0603 89.25,119.25 r0 bottom locked
CC97 "023-221220-0" CC1608-0603 89.25,122.25 r180 bottom locked
CC98 "NC" CC1608-0603 17.75,138.25 r0 top locked
CC99 "NC" CC1608-0603 113.75,199 r180 top locked
CC100 "NC" CC1608-0603 113.75,197.5 r180 top locked
CC101 "023-221220-0" CC1608-0603 111.25,118.75 r0 bottom locked
CC102 "023-221220-0" CC1608-0603 111.25,121.75 r180 bottom locked
CC103 "023-105220-0" CC1608-0603 71.75,134.25 r0 top locked
CC104 "023-105220-0" CC1608-0603 58.25,133.5 r90 bottom locked
CC105 "023-105220-0" CC1608-0603 71.75,130.75 r0 top locked
CC106 "023-105220-0" CC1608-0603 68,134.25 r180 bottom locked
CC107 "023-225330-0" CC2012-0805 46.25,203.75 r0 bottom locked
CC108 "023-105220-0" CC1608-0603 63.75,181.25 r270 bottom locked
CC109 "023-105330-0" CC2012-0805 65.5,181.5 r270 bottom locked
CC110 "023-105220-0" CC1608-0603 70.25,196.75 r180 bottom locked
CC111 "023-105220-0" CC1608-0603 70.25,201 r180 bottom locked
CC112 "023-105220-0" CC1608-0603 65.75,205.25 r270 bottom locked
CC113 "023-105220-0" CC1608-0603 62.25,205.25 r270 bottom locked
CC114 "023-105220-0" CC1608-0603 58.25,205.25 r270 bottom locked
CC115 "023-105220-0" CC1608-0603 52.25,205.25 r270 bottom locked
CC116 "023-105220-0" CC1608-0603 70.25,192.75 r180 bottom locked
CC117 "023-105220-0" CC1608-0603 46,202 r0 bottom locked
CC118 "023-105220-0" CC1608-0603 46,197 r0 bottom locked
CC119 "023-105220-0" CC1608-0603 46,193.25 r0 bottom locked
CC120 "023-105220-0" CC1608-0603 46,190.5 r0 bottom locked
CC121 "023-105220-0" CC1608-0603 56,181.25 r90 bottom locked
CC122 "023-105220-0" CC1608-0603 70.25,188.75 r180 bottom locked
CC123 "023-225330-0" CC2012-0805 70,187 r180 bottom locked
CC124 "023-105220-0" CC1608-0603 46,199.5 r0 bottom locked
CC125 "023-105220-0" CC1608-0603 60.25,181.25 r90 bottom locked
CC126 "023-105220-0" CC1608-0603 70.25,185.25 r180 bottom locked
CC127 "023-105220-0" CC1608-0603 70.25,191.25 r180 bottom locked
CC128 "023-105220-0" CC1608-0603 70.25,198.5 r180 bottom locked
CC129 "023-105220-0" CC1608-0603 64,205.25 r270 bottom locked
CC130 "023-105220-0" CC1608-0603 55.75,205.25 r270 bottom locked
CC131 "023-105220-0" CC1608-0603 50.5,205.25 r270 bottom locked
CC132 "023-102220-0" CC1608-0603 41.5,173.25 r90 bottom locked
CC133 "023-102220-0" CC1608-0603 43.25,173.25 r90 top locked
CC134 "023-102220-0" CC1608-0603 45,173.25 r90 top locked
CC135 "NC/0603" CC1608-0603 84,183 r180 top locked
CC136 "023-102220-0" CC1608-0603 39.5,194.75 r0 bottom locked
CC137 "023-102220-0" CC1608-0603 39.5,194.75 r0 top locked
CC138 "023-106330-0" CC2012-0805 49.75,181 r270 bottom locked
CC139 "023-102220-0" CC1608-0603 39.5,193 r0 top locked
CC140 "023-102220-0" CC1608-0603 35.5,194.75 r0 top locked
CC141 "023-105220-0" CC1608-0603 100.5,206.5 r180 top locked
CC142 "023-105220-0" C0603SM 121.25,237.75 r180 top locked
CC143 "023-102220-0" CC1608-0603 39.5,179.5 r0 top locked
CC144 "023-102220-0" CC1608-0603 39.5,178 r0 bottom locked
CC145 "023-102220-0" CC1608-0603 38,173.25 r90 bottom locked
CC146 "023-102220-0" CC1608-0603 88,206 r180 top locked
CC147 "023-105330-0" CC2012-0805 53.25,181 r270 bottom locked
CC148 "023-102220-0" CC1608-0603 39.75,173.25 r90 top locked
CC149 "023-102220-0" CC1608-0603 46.75,173.25 r90 bottom locked
CC150 "023-225330-0" CC2012-0805 52,175 r90 bottom locked
CC151 "023-225330-0" CC2012-0805 54,175 r90 bottom locked
CC152 "023-102220-0" CC1608-0603 39.5,190 r0 top locked
CC153 "023-102220-0" CC1608-0603 39.5,188.5 r0 bottom locked
CC154 "023-102220-0" CC1608-0603 39.5,184 r0 top locked
CC155 "023-102220-0" CC1608-0603 39.5,187 r0 top locked
CC156 "023-102220-0" CC1608-0603 39.5,185.5 r0 bottom locked
CC157 "023-105220-0" CC1608-0603 57,184.75 r270 bottom locked
CC158 "023-105220-0" CC1608-0603 46,186 r180 bottom locked
CC159 "023-105220-0" CC1608-0603 46,183.75 r0 bottom locked
CC160 "023-105220-0" CC1608-0603 46,188.25 r180 bottom locked
CC161 "023-220220-0" CC1608-0603 78,196 r180 bottom locked
CC162 "023-220220-0" CC1608-0603 77.5,189.5 r0 top locked
CC163 "023-105220-0" CC1608-0603 43,140.5 r0 top locked
CC164 "023-220220-0" CC1608-0603 49.25,143.75 r0 top locked
CC165 "023-102220-0" CC1608-0603 39.5,181 r0 bottom locked
CC166 "023-103220-0" CC1608-0603 65.5,170.75 r180 top locked
CC167 "023-103220-0" C0603SM 48.5,173.25 r90 bottom locked
CC168 "023-103220-0" C0603SM 50.25,173.25 r90 top locked
CC169 "023-105220-0" CC1608-0603 49.25,145.25 r180 bottom locked
CC170 "023-105220-0" CC1608-0603 40.75,145.25 r0 bottom locked
CC171 "023-102220-0" CC1608-0603 57.75,223.25 r180 bottom locked
CC172 "023-102220-0" CC1608-0603 54.5,223.25 r180 bottom locked
CC173 "023-102220-0" CC1608-0603 51.25,223.25 r180 bottom locked
CC174 "023-102220-0" CC1608-0603 48,223.25 r180 bottom locked
CC175 "023-220220-0" CC1608-0603 62,155.25 r180 bottom locked
CC176 "023-220220-0" CC1608-0603 62,157 r180 bottom locked
CC177 "023-105220-0" CC1608-0603 93.25,145 r0 top locked
CC178 "023-105220-0" CC1608-0603 80.75,144.25 r180 top locked
CC179 "023-105220-0" CC1608-0603 60.25,244.25 r0 top locked
CC180 "023-105220-0" CC1608-0603 30.25,206.25 r0 top locked
CC181 "023-105220-0" CC1608-0603 30.25,197.25 r0 top locked
CC182 "023-105220-0" CC1608-0603 67.75,244.75 r180 top locked
CC183 "023-105220-0" CC1608-0603 130.25,230.75 r180 top locked
CC184 "023-105220-0" CC1608-0603 121.25,228.5 r0 top locked
CC185 "023-105220-0" CC1608-0603 64.25,229.75 r0 bottom locked
CC186 "023-105220-0" CC1608-0603 71,229.5 r0 top locked
CC187 "023-105220-0" CC1608-0603 88.25,228.5 r0 top locked
CC191 "023-105220-0" CC1608-0603 41.5,247.75 r90 top locked
CC192 "023-105220-0" CC1608-0603 38,247.75 r90 top locked
CC193 "023-105220-0" CC1608-0603 104.75,229.25 r0 top locked
CC194 "023-105220-0" C0603SM 122.5,77 r270 bottom locked
CC196 "023-105220-0" CC1608-0603 31.75,226.5 r0 bottom locked
CC197 "020-157111-0" EC2.54/6.3#1 119,77.75 r180 top locked (schematic designator CA81)
CC198 "023-102220-0" CC1608-0603 25.75,224.5 r0 bottom locked
CC200 "023-102220-0" CC1608-0603 25.75,223 r0 bottom locked
CC201 "023-105220-0" CC1608-0603 27.75,233.25 r180 bottom locked
CC202 "023-102220-0" CC1608-0603 30.25,229.25 r180 bottom locked
CC203 "023-106350-0" CC3216-1206 27,237.25 r180 bottom locked
CC204 "023-105220-0" CC1608-0603 108.5,230.25 r0 bottom locked
CC205 "023-105220-0" CC1608-0603 97.75,232.25 r90 bottom locked
CC206 "023-105220-0" CC1608-0603 83.5,248 r90 top locked
CC207 "023-106350-0" CC3216-1206 99.5,229.5 r180 bottom locked
CC208 "023-106350-0" CC3216-1206 79.5,247.25 r90 top locked
CC209 "023-106350-0" CC3216-1206 103.5,231.5 r90 bottom locked
CC210 "023-221220-0" CC1608-0603 104.75,240.5 r180 top locked
CC211 "023-221220-0" CC1608-0603 108.75,241 r0 top locked
CC212 "023-221220-0" CC1608-0603 88.25,243.5 r180 top locked
CC213 "023-105220-0" CC1608-0603 104.75,237.5 r0 top locked
CC214 "023-105220-0" CC1608-0603 92.25,239.5 r0 top locked
CC215 "023-105220-0" CC1608-0603 88.25,234.75 r0 top locked
CC216 "023-105220-0" CC1608-0603 59.25,145 r0 top locked
CC217 "023-105220-0" CC1608-0603 108.75,237 r0 top locked
CC218 "023-105220-0" CC1608-0603 108.75,239.5 r0 top locked
CC219 "023-105220-0" CC1608-0603 35.5,236.75 r0 top locked
CC220 "023-105220-0" CC1608-0603 75.75,239.5 r0 top locked
CC221 "023-105220-0" CC1608-0603 118.75,162 r0 top locked
CC222 "023-105220-0" CC1608-0603 122.75,162 r0 top locked
CC223 "023-105220-0" CC1608-0603 91.5,248 r90 top locked
CC224 "023-105220-0" CC1608-0603 115,246 r90 top locked
CC225 "023-105220-0" CC1608-0603 16.25,236.75 r90 top locked
CC226 "023-105220-0" CC1608-0603 74.75,229.5 r270 bottom locked
CC227 "023-105220-0" CC1608-0603 121.75,164 r0 bottom locked
CC228 "023-221220-0" CC1608-0603 92.25,245.5 r0 top locked
CC229 "023-221220-0" CC1608-0603 121.25,240.75 r180 top locked
CC230 "023-221220-0" CC1608-0603 75.75,241 r0 top locked
CC231 "023-105220-0" CC1608-0603 121.25,235.25 r0 top locked
CC232 "023-105220-0" CC1608-0603 75.75,237 r180 top locked
CC233 "023-105220-0" CC1608-0603 98.5,248 r90 top locked
CC234 "023-105220-0" CC1608-0603 107.75,248 r90 top locked
CC235 "023-105220-0" CC1608-0603 80.5,229.5 r270 bottom locked
CC236 "023-105220-0" CC1608-0603 26.5,241.75 r270 bottom locked
CC237 "023-221220-0" CC1608-0603 104.75,242 r180 top locked
CC238 "023-221220-0" CC1608-0603 108.75,245.5 r0 top locked
CC239 "023-221220-0" CC1608-0603 88.25,239 r180 top locked
CC240 "023-105220-0" CC1608-0603 92.25,235.5 r180 top locked
CC241 "023-105220-0" CC1608-0603 108.75,235.5 r180 top locked
CC242 "023-105220-0" CC1608-0603 88.25,237.5 r0 top locked
CC243 "023-105220-0" CC1608-0603 35.5,235.25 r0 top locked
CC244 "023-105220-0" CC1608-0603 89.25,232.5 r90 bottom locked
CC245 "023-105220-0" CC1608-0603 114,230.75 r90 bottom locked
CC246 "023-105220-0" CC1608-0603 74.75,248 r90 top locked
CC247 "023-105220-0" CC1608-0603 16.25,240.5 r270 top locked
CC248 "023-106330-0" CC2012-0805 79.75,204.75 r270 bottom locked
CC249 "023-105220-0" CC1608-0603 76,204.5 r270 bottom locked
CC250 "023-221220-0" CC1608-0603 92.25,241 r0 top locked
CC251 "023-106330-0" C0805SM 133,17.5 r90 top locked
CC252 "023-105220-0" C0603SM 75.75,235.5 r0 top locked
CC255 "023-105220-0" CC1608-0603 16,223.25 r90 top locked
CC265 "023-105220-0" CC1608-0603 17.75,173.5 r0 bottom locked
CC266 "023-105220-0" CC1608-0603 17.75,176.5 r0 bottom locked
CC267 "023-102220-0" CC1608-0603 126.5,202.5 r180 bottom locked
CC268 "023-102220-0" CC1608-0603 21.75,178.75 r0 bottom locked
CC269 "023-102220-0" CC1608-0603 21.75,183.25 r0 bottom locked
CC270 "023-225330-0" CC2012-0805 15,164.25 r90 bottom locked
CC271 "023-105220-0" CC1608-0603 105.25,195 r180 top locked
CC272 "023-225330-0" CC2012-0805 17.25,182.75 r90 bottom locked
CC273 "023-105220-0" CC1608-0603 113,194.5 r90 top locked
CC274 "023-102220-0" CC1608-0603 118,213.25 r180 bottom locked
CC275 "023-105220-0" CC1608-0603 118,213.25 r180 top locked
CC276 "023-105220-0" CC1608-0603 130.5,213 r0 top locked
CC277 "023-105220-0" CC1608-0603 118,200.75 r180 top locked
CC278 "023-105220-0" CC1608-0603 17.75,179.5 r180 top locked
CC280 "023-105220-0" CC1608-0603 130.5,201.25 r0 top locked
CC281 "023-102220-0" CC1608-0603 118,210.25 r180 bottom locked
CC282 "023-105220-0" CC1608-0603 30.25,177.75 r180 top locked
CC283 "023-105220-0" CC1608-0603 30.25,171.75 r180 top locked
CC284 "023-102220-0" CC1608-0603 126.5,210.25 r180 bottom locked
CC286 "023-102220-0" CC1608-0603 26.75,212.5 r180 bottom locked
CC287 "023-105220-0" CC1608-0603 32,213 r90 top locked
CC288 "023-102220-0" CC1608-0603 32,217 r270 top locked
CC289 "023-102220-0" CC1608-0603 126.5,215.5 r180 bottom locked
CC291 "023-105220-0" CC1608-0603 31.25,117.5 r90 top locked
CC292 "023-105220-0" CC1608-0603 44.75,104.25 r180 top locked
CC293 "023-105220-0" CC1608-0603 45.5,114.5 r0 top locked
CC294 "023-105220-0" CC1608-0603 52.5,127.25 r180 top locked
CC295 "023-474250-0" CC2012-0805 50.75,122.5 r90 top locked
CC296 "023-105220-0" CC1608-0603 70.25,183.75 r180 bottom locked
CC297 "023-105330-0" CC2012-0805 67.5,181.5 r270 bottom locked
CC298 "023-105220-0" CC1608-0603 58.5,184.75 r90 bottom locked
CC299 "023-102220-0" CC1608-0603 60,184.75 r90 bottom locked
CC300 "023-105330-0" CC2012-0805 61.75,185 r90 bottom locked
CC301 "023-105220-0" CC1608-0603 51.5,180.75 r90 bottom locked
CC302 "023-474250-0" CC2012-0805 43.75,180 r270 bottom locked
CC303 "023-105330-0" CC2012-0805 51.75,185 r270 bottom locked
CC304 "023-105220-0" CC1608-0603 50,184.75 r90 bottom locked
CC305 "023-102220-0" CC1608-0603 48.5,184.75 r270 bottom locked
CC306 "023-221220-0" CC1608-0603 121.25,242.25 r180 top locked
CC307 "023-221220-0" CC1608-0603 75.75,245.5 r0 top locked
CC308 "023-105330-0" CC2012-0805 52.75,188 r0 bottom locked
CC309 "023-105330-0" CC2012-0805 61.75,188 r0 bottom locked
CC317 "023-105220-0" CC1608-0603 22.25,239.75 r180 top locked
CC318 "023-105220-0" CC1608-0603 38.5,104.25 r0 top locked
CC319 "023-105220-0" CC1608-0603 16,215.25 r270 top locked
CC320 "023-106350-0" CC3216-1206 127.75,159.75 r90 bottom locked
CC321 "023-105220-0" CC1608-0603 125.75,159.5 r270 bottom locked
CC322 "023-106350-0" CC3216-1206 127.75,154.5 r90 bottom locked
CC323 "023-105220-0" CC1608-0603 125.75,154.5 r270 bottom locked
CC326 "023-106330-0" CC2012-0805 128,167.25 r270 bottom locked
CC327 "023-105220-0" CC1608-0603 126,167.25 r90 bottom locked
CC328 "023-225330-0" CC2012-0805 27.5,235 r180 bottom locked
CC329 "023-225330-0" CC2012-0805 96,232 r90 bottom locked
CC330 "023-225330-0" CC2012-0805 105.75,231.25 r90 bottom locked
CC331 "023-225330-0" CC2012-0805 81.75,247.75 r90 top locked
CC332 "023-225330-0" CC2012-0805 93.5,248.25 r90 top locked
CC333 "023-225330-0" CC2012-0805 116.75,246.25 r90 top locked
CC334 "023-225330-0" CC2012-0805 18,237 r90 top locked
CC335 "023-225330-0" CC2012-0805 76.75,229.25 r270 bottom locked
CC336 "023-225330-0" CC2012-0805 100.25,248.25 r90 top locked
CC337 "023-225330-0" CC2012-0805 109.5,248.25 r90 top locked
CC338 "023-225330-0" CC2012-0805 82.5,229.25 r270 bottom locked
CC339 "023-225330-0" CC2012-0805 28.25,241.5 r270 bottom locked
CC340 "023-225330-0" CC2012-0805 87.5,232.25 r90 bottom locked
CC341 "023-225330-0" CC2012-0805 112.25,230.5 r90 bottom locked
CC342 "023-225330-0" CC2012-0805 18,240.75 r270 top locked
CC343 "023-225330-0" CC2012-0805 76.5,248.25 r90 top locked
CC344 "023-102220-0" CC1608-0603 24.25,168.25 r90 bottom locked
CC345 "023-102220-0" CC1608-0603 25,183.25 r180 bottom locked
CC346 "023-101220-0" CC1608-0603 27,171.75 r0 top locked
CC347 "023-101220-0" CC1608-0603 21.75,176.75 r0 bottom locked
CC348 "023-106330-0" CC2012-0805 39.75,248 r270 top locked
CC349 "023-106330-0" CC2012-0805 77.75,204.75 r270 bottom locked
CC350 "023-105220-0" CC1608-0603 22.25,238.25 r180 top locked
CC351 "023-105220-0" CC1608-0603 104.75,235.25 r0 top locked
CC352 "023-105220-0" CC1608-0603 92.25,237 r180 top locked
CC354 "023-225330-0" CC2012-0805 92.75,165 r0 bottom locked
CC355 "023-105220-0" CC1608-0603 22.25,236.75 r180 top locked
CC356 "023-106330-0" CC2012-0805 52.75,125.5 r0 top locked
CC393 "023-105220-0" CC1608-0603 49.75,134.25 r0 top locked
CC394 "023-102220-0" CC1608-0603 94.25,160.5 r90 top locked
CC395 "023-102220-0" CC1608-0603 95.75,160.5 r90 bottom locked
CC396 "023-105220-0" CC1608-0603 44.25,128.25 r0 top locked
CC397 "023-105220-0" CC1608-0603 49.75,130.5 r0 top locked
CC398 "023-105220-0" CC1608-0603 47.75,134.25 r0 bottom locked
CC399 "023-102220-0" CC1608-0603 98.75,160.5 r90 bottom locked
CC401 "023-105220-0" CC1608-0603 116,110.25 r0 top locked
CC402 "023-105220-0" CC1608-0603 118.25,85.25 r270 bottom locked
CC403 "023-220220-0" CC1608-0603 112.25,170.5 r0 top locked
CC404 "023-220220-0" CC1608-0603 112,179.5 r180 top locked
CC405 "023-105220-0" CC1608-0603 93.25,109.5 r0 top locked
CC406 "023-102220-0" CC1608-0603 85.75,166 r0 bottom locked
CC407 "023-102220-0" CC1608-0603 85.75,163 r0 top locked
CC408 "023-102220-0" CC1608-0603 85.75,163 r0 bottom locked
CC409 "023-225330-0" CC2012-0805 105.25,174 r0 bottom locked
CC411 "023-105220-0" CC1608-0603 131,17.25 r90 top locked
CC412 "023-105330-0" CC2012-0805 126.75,25.25 r180 bottom locked
CC413 "023-105330-0" CC2012-0805 126.75,25.25 r0 top locked
CC414 "023-105330-0" CC2012-0805 123,25.25 r180 top locked
CC415 "023-105330-0" CC2012-0805 123,25.25 r0 bottom locked
CC416 "023-102220-0" CC1608-0603 85.75,169 r0 top locked
CC417 "023-102220-0" CC1608-0603 85.75,169 r0 bottom locked
CC418 "023-102220-0" CC1608-0603 85.75,166 r0 top locked
CC420 "023-105220-0" CC1608-0603 75.5,173 r0 top locked
CC421 "023-102220-0" CC1608-0603 85.25,160.5 r90 top locked
CC422 "023-102220-0" CC1608-0603 86.75,160.5 r90 bottom locked
CC423 "023-102220-0" CC1608-0603 88.25,160.5 r90 top locked
CC424 "023-105220-0" CC1608-0603 100.75,177.75 r90 bottom locked
CC425 "023-105220-0" CC1608-0603 99.75,166 r90 bottom locked
CC426 "023-103220-0" CC1608-0603 77.25,171.25 r0 top locked
CC427 "023-225330-0" CC2012-0805 96,177.5 r270 bottom locked
CC428 "023-102220-0" CC1608-0603 89.75,160.5 r90 bottom locked
CC429 "023-102220-0" CC1608-0603 92.75,160.5 r90 bottom locked
CC430 "023-102220-0" CC1608-0603 91.25,160.5 r90 top locked
CC431 "NC/0603" CC1608-0603 84,189 r180 top locked
CC434 "NC/0603" CC1608-0603 84,180 r0 top locked
CC436 "023-105220-0" CC1608-0603 93,166.75 r180 bottom locked
CC437 "023-105220-0" CC1608-0603 92,169.25 r180 bottom locked
CC439 "023-105220-0" CC1608-0603 85.75,172 r180 top locked
CC440 "023-225330-0" CC2012-0805 92.25,173.75 r180 bottom locked
CC442 "023-105220-0" CC1608-0603 100.5,194.5 r0 top locked
CC445 "023-225330-0" CC2012-0805 99,177.5 r90 bottom locked
CC446 "023-102220-0" CC1608-0603 17.75,146 r180 top locked
CC447 "023-102220-0" CC1608-0603 17.75,143 r180 top locked
CC448 "023-102220-0" CC1608-0603 30.25,146.75 r0 top locked
CC449 "023-102220-0" CC1608-0603 30.25,142.25 r0 top locked
CNA1 "110-252000-0" CN2.5-4P#1 12.25,81.5 r0 top locked
CNA23 "110-252000-0" CN2.5-4P#2 37.5,256 r0 top locked
CNBA3 "110-309501-0" CN2P9.52 55.75,11.25 r0 top locked
CNC1 "110-300001-0" CN-SIP2.54-2P#1 62.5,127.5 r0 top locked
CNC2 "110-300001-0" CN-SIP2.54-2P#2 48.5,213.25 r180 top locked
CNC3 "110-100000-0" CN2.54-2*7P 48.25,156 r0 top locked
CNC4 "110-251000-0" CN2.5-3P 128.25,71.75 r0 top locked (schematic designator CNA10)
CNC5 "110-251000-0" CN2.5-3P 128.25,63.25 r0 top locked (schematic designator CNA10)
CNC6 "110-103250-0" CN2.54-2*10P_2 10.5,225.5 r270 top locked
CNC7 "110-251000-0" CN2.5-3P 128.25,80.25 r0 top locked (schematic designator CNA10)
CNC10 "110-310000-0" CN2.54-2*20P#1 131.5,154.8 r270 top locked
CNC25 "110-103030-0" CN2.54-2*7P_2 105,5.5 r0 top locked
CNC26 "110-100000-0" CN2.54-2*7P 120,177.25 r270 top locked
CNC27 "110-252000-0" CN2.5-4P#2 79,12.5 r0 top locked
CND7 "110-310000-0" CN2.54-2*20P#2 90.5,254.75 r180 top locked
DA5 "060-310030-0" "D2PAK - 1" 66.5,74.25 r270 top locked
DA6 "083-100010-0" TVS-SMB 42.5,35.5 r90 top locked
DA7 "060-310020-0" DO-SMB 58,103.75 r270 top locked
DA8 "060-100000-0" DO-5.08/2.5 39.5,47.75 r270 top locked
DA9 "060-110010-0" DO-SMA 52.75,67.75 r180 top locked
DA10 "060-110000-0" DO-SMA 84.5,70.25 r270 top locked
DA11 "060-310030-0" "D2PAK - 1" 101.5,20.75 r180 top locked
DA12 "060-310020-0" DO-SMB 108.5,57.75 r180 top locked
DA13 "060-310030-0" "D2PAK - 1" 101.5,35 r180 top locked
DA14 "060-500010-0" SOD-123#1 11,60 r270 bottom locked
DA15 "060-500010-0" SOD-123#1 40.25,76.75 r270 bottom locked
DA16 "NC" SOD-123#1 23,81 r0 top locked
DA17 "060-310000-0" SOD-123#1 39.5,80.5 r180 top locked
DC1 "060-610010-0" SC-70 102.5,127.25 r0 bottom locked
DC2 "060-610010-0" SC-70 102.5,141.5 r0 bottom locked
DC3 "060-500010-0" SOD-123#2 127,66.25 r180 bottom locked
DC4 "060-500010-0" SOD-123#2 127,74.75 r180 bottom locked
DC5 "060-500010-0" SOD-123#2 127,56.75 r180 bottom locked
DC6 "060-610010-0" SC-70 80.75,127.5 r0 bottom locked
DC7 "060-500010-0" SOD-123#2 130.25,59.5 r180 bottom locked
DC8 "060-500010-0" SOD-123#2 130.25,68.75 r180 bottom locked
DC9 "060-500010-0" SOD-123#1 94,212.75 r270 bottom locked
DC10 "NC" SOD-123#1 56.25,142.5 r270 top locked
DC11 "060-500010-0" SOD-123#1 62.25,130.5 r180 bottom locked
DC12 "060-510000-0" SOT-23 41.345,168 r0 top locked
DC13 "060-510000-0" SOT-23 43.25,168 r180 bottom locked
DC14 "060-510000-0" SOT-23 47,168 r180 bottom locked
DC15 "060-510000-0" SOT-23 37.75,168 r0 top locked
DC16 "060-510000-0" SOT-23 35,177.5 r90 bottom locked
DC17 "060-510000-0" SOT-23 35,179.5 r270 top locked
DC18 "060-510000-0" SOT-23 39.75,168 r180 bottom locked
DC19 "060-510000-0" SOT-23 45,168 r0 top locked
DC20 "060-510000-0" SOT-23 35,190.75 r270 top locked
DC21 "060-510000-0" SOT-23 35,188.75 r90 bottom locked
DC22 "060-510000-0" SOT-23 35,181.5 r90 bottom locked
DC23 "060-510000-0" SOT-23 35,185 r90 bottom locked
DC24 "060-510000-0" SOT-23 35,187 r270 top locked
DC25 "060-500010-0" SOD-123#1 43.75,144 r90 bottom locked
DC26 "060-500010-0" SOD-123#1 46.25,144 r90 bottom locked
DC27 "060-510000-0" SOT-23 35,183.5 r270 top locked
DC28 "060-510000-0" SOT-23 48.5,168 r0 top locked
DC29 "060-510000-0" SOT-23 50.5,168 r180 bottom locked
DC30 "060-500010-0" SOD-123#2 130.25,77.25 r180 bottom locked
DC31 "060-500010-0" SOD-123#2 33.25,232.75 r0 top locked
DC32 "060-310000-0" SOD-123#1 25.25,229.5 r180 bottom locked
DC33 "060-500010-0" SOD-123#1 28,209.75 r180 top locked
DC34 "060-500010-0" SOD-123#1 26.5,218.75 r0 bottom locked
DC36 "060-500010-0" SOD-123#2 33.25,230.25 r0 top locked
DC37 "060-310000-0" SOD-123#1 78.5,202.75 r90 top locked
DC38 "060-310000-0" SOD-123#1 83,202.75 r90 top locked
DC39 "060-500010-0" SOD-123#2 24.75,230.25 r180 top locked
DC40 "060-500010-0" SOD-123#2 24.75,232.75 r180 top locked
DC41 "060-310000-0" SOD-123#2 28,214.75 r0 top locked
DC42 "060-500010-0" SOD-123#2 28,212.25 r0 top locked
DC43 "060-310000-0" SOD-123#2 28,217.25 r0 top locked
DC44 "060-310000-0" SOD-123#2 28,219.75 r0 top locked
DC45 "060-500010-0" SOD-123#1 17,167.5 r0 bottom locked
DC46 "060-500010-0" SOD-123#1 14.75,171.75 r270 bottom locked
DC47 "060-500010-0" SOD-123#1 19.25,189.25 r0 bottom locked
DC48 "060-500010-0" SOD-123#1 14.75,178.75 r90 bottom locked
DC49 "NC" SOD-123#1 30.75,183 r270 top locked
DC50 "NC" SOD-123#1 26.75,179.25 r270 bottom locked
DC54 "060-510000-0" SOT-23 94.25,156 r0 top locked
DC55 "060-510000-0" SOT-23 96.25,156 r180 bottom locked
DC56 "060-510000-0" SOT-23 99.5,156 r180 bottom locked
DC58 "060-500010-0" SOD-123#1 40.5,132.5 r90 bottom locked
DC59 "060-510000-0" SOT-23 81.25,164.5 r270 top locked
DC60 "060-510000-0" SOT-23 81.25,165.75 r90 bottom locked
DC61 "060-510000-0" SOT-23 81.25,162.5 r90 bottom locked
DC62 "060-510000-0" SOT-23 81.25,169 r90 bottom locked
DC63 "060-510000-0" SOT-23 81.25,171 r270 top locked
DC64 "060-510000-0" SOT-23 81.25,167.75 r270 top locked
DC65 "060-510000-0" SOT-23 86.5,156 r180 bottom locked
DC66 "060-510000-0" SOT-23 87.75,156 r0 top locked
DC67 "060-510000-0" SOT-23 84.5,156 r0 top locked
DC68 "060-510000-0" SOT-23 91,156 r0 top locked
DC69 "060-510000-0" SOT-23 89.75,156 r180 bottom locked
DC70 "060-510000-0" SOT-23 93,156 r180 bottom locked
EC1 "020-476003-0" EC47UF/6.3VSM-5 39.5,98.75 r90 top locked
EC2 "020-476003-0" EC47UF/6.3VSM-5 31.25,110.75 r90 top locked
EC3 "020-476003-0" EC47UF/6.3VSM-5 45.75,98.75 r90 top locked
EC4 "020-476003-0" EC47UF/6.3VSM-5 39.25,121.75 r90 top locked
EC5 "020-476003-0" EC47UF/6.3VSM-5 45.5,122 r90 top locked
EC6 "020-227100-1" EC220UF/16VSM-6.3 20.75,214 r270 top locked (schematic designator EC8)
EC8 "020-227100-1" EC220UF/16VSM-6.3 20.75,223.75 r270 top locked
FA1 "160-201000-0" 17KFUSE1812L110-33 27.25,248.75 r270 top locked
FA2 "160-201000-0" 17KFUSE1812L110-33 129,56.75 r0 top locked
FA3 "160-201000-0" 17KFUSE1812L110-33 100,49.5 r270 top locked (schematic designator FA2)
GND-DRV "NC" TEST-12 73,86.75 r90 top locked
GND_COM "NC" TEST-12 123.75,39.5 r180 top locked
JC1 "110-300001-0" CN-SIP2.54-2P#1 37,131 r270 top locked
JC2 "110-300001-0" CN-SIP2.54-2P#1 111,185.75 r0 top locked
LA2 "040-390000-0" "L1110SM- 39UH" 66,90.75 r90 top locked
LA3 "080-200000-0" L2012-0805 72.25,98.5 r90 bottom locked
LA4 "040-390000-0" "L1110SM- 39UH" 66,102.5 r90 top locked
LA5 "080-200000-0" L2012-0805 46.75,89.5 r180 bottom locked
LA6 "040-109100-0" L4848SM 77.75,80 r90 top locked
LA7 "080-200000-0" L2012-0805 77.75,90.5 r180 bottom locked
LA8 "080-200000-0" L2012-0805 45.75,86.75 r90 top locked
LA9 "080-200000-0" L2012-0805 43.75,86.75 r90 top locked
LA10 "040-390000-0" "L1110SM- 39UH" 127.5,33 r0 top locked
LA11 "080-200000-0" L2012-0805 131,51 r0 top locked
LA12 "040-390000-0" "L1110SM- 39UH" 110,65.75 r90 top locked
LA13 "080-200000-0" L2012-0805 116.75,57.5 r0 bottom locked
LA14 "040-390000-0" "L1110SM- 39UH" 118,51 r180 top locked
LA15 "080-200000-0" L2012-0805 102.75,45 r180 bottom locked
LA16 "080-200000-0" L2012-0805 74.25,98.5 r90 bottom locked
LA17 "080-200000-0" L2012-0805 46.75,87.5 r180 bottom locked
LA18 "080-200000-0" L2012-0805 131,53.25 r0 top locked
LA19 "080-200000-0" L2012-0805 116.75,59.5 r0 bottom locked
LA20 "080-200000-0" L2012-0805 102.75,47 r180 bottom locked
LC1 "080-200001-0" L2012-0805 63.75,185 r270 bottom locked
LC2 "080-200001-0" L2012-0805 53.75,185 r270 bottom locked
LDM1 "060-010010-0" LED2012-0805SM 58.25,133.5 r270 top locked
LDM2 "060-011000-0" LED2012-0805SM 35,121.75 r90 top locked
LDM3 "060-010010-0" LED2012-0805SM 49.25,136.75 r0 top locked
LEDA1 "060-011000-0" LED2012-0805SM 80.25,102.25 r180 top locked (schematic designator LEDE1)
MARK1 "NC" MARK_B#1 105.25,164.75 r0 top locked
MARK2 "NC" MARK_A#1 90.75,179.25 r0 top locked
MARK3 "NC" MARK_A#1 71.75,206.75 r0 top locked
MARK4 "NC" MARK_B#1 44.75,179.75 r0 top locked
MARK5 "NC" MARK_A#1 20,16 r0 top locked
MARK6 "NC" MARK_B#1 124,12.5 r0 top locked
MARK7 "NC" MARK_A#2 48,255 r0 top locked
MARK8 "NC" MARK_B#2 134,238 r0 top locked
MARK9 "NC" MARK_A#2 25,15 r180 bottom locked
MARK10 "NC" MARK_B#2 96,11 r90 bottom locked
MARK11 "NC" MARK_A#2 27,253 r180 bottom locked
MARK12 "NC" MARK_B#2 134,238 r90 bottom locked
NTCC1 "016-103000-0" TTC3A103F34D2EY 105,191 r180 top locked
PN1 "Bar code box" "Bar code box" 9,159.75 r270 top locked
QA5 "063-000010-0" TO-247 17,48.5 r270 top locked
QA5-HS "431-100000-0" HS30x10x37.5 19.75,48.5 r270 top locked
QA6 "061-010000-0" SOT-23 40.25,71.75 r270 bottom locked
QA7 "062-000010-0" SOT-23 29.5,95.25 r0 bottom locked
QA8 "050-210020-0" SOT89N 39.75,76.5 r90 top locked
QA9 "061-110000-0" SOT-23 45.5,78 r180 bottom locked
QA10 "061-010000-0" SOT-23 49,78 r180 bottom locked
QA11 "NC" SOT-23 21.75,76.5 r90 top locked
QA12 "050-210020-0" SOT89N 33.5,96.25 r0 top locked
QA13 "063-010010-0" "SOT-23 - 1" 40.5,95.5 r0 bottom locked
QC1 "061-010000-0" SOT-23 110.25,75 r0 bottom locked (schematic designator QA4)
QC2 "061-010000-0" SOT-23 60.75,132.5 r90 bottom locked
QC3 "061-110000-0" SOT-23 66.75,131 r0 bottom locked
QC4 "050-210020-0" SOT89 34.5,248.25 r90 top locked
QC6 "061-010000-0" SOT-23 30.095,237.5 r0 bottom locked
QC7 "061-010000-0" SOT-23 101.5,233.75 r270 bottom locked
QC8 "061-010000-0" SOT-23 109.75,233.75 r270 bottom locked
QC9 "061-010000-0" SOT-23 85,245.75 r270 bottom locked
QC10 "061-110000-0" SOT-23 33.345,237.5 r0 bottom locked
QC11 "061-110000-0" SOT-23 101.5,237 r270 bottom locked
QC12 "061-110000-0" SOT-23 109.5,237 r270 bottom locked
QC13 "061-110000-0" SOT-23 85,242.5 r270 bottom locked
QC14 "061-010000-0" SOT-23 120.75,161 r0 bottom locked
QC15 "061-010000-0" SOT-23 93,245.75 r270 bottom locked
QC16 "061-010000-0" SOT-23 117.75,232.75 r270 bottom locked
QC17 "061-010000-0" SOT-23 76.5,233.75 r270 bottom locked
QC18 "061-010000-0" SOT-23 17.095,237.75 r0 bottom locked
QC19 "061-110000-0" SOT-23 93,242.5 r270 bottom locked
QC20 "061-110000-0" SOT-23 117.75,236 r270 bottom locked
QC21 "061-110000-0" SOT-23 20.345,237.75 r0 bottom locked
QC22 "061-110000-0" SOT-23 76.5,237 r270 bottom locked
QC23 "061-010000-0" SOT-23 101.5,245.75 r270 bottom locked
QC24 "061-010000-0" SOT-23 109.5,245.75 r270 bottom locked
QC25 "061-010000-0" SOT-23 85,233.75 r270 bottom locked
QC26 "061-010000-0" SOT-23 32,240.5 r180 bottom locked
QC27 "061-110000-0" SOT-23 35.25,240.5 r180 bottom locked
QC28 "061-110000-0" SOT-23 101.5,242.5 r270 bottom locked
QC29 "061-110000-0" SOT-23 109.5,242.5 r270 bottom locked
QC30 "061-110000-0" SOT-23 85,237 r270 bottom locked
QC31 "061-010000-0" SOT-23 93,233.75 r270 bottom locked
QC32 "061-010000-0" SOT-23 117.75,242.5 r270 bottom locked
QC33 "061-010000-0" SOT-23 76.5,245.75 r270 bottom locked
QC34 "061-010000-0" SOT-23 22.25,240.25 r180 bottom locked
QC35 "061-110000-0" SOT-23 93,237 r270 bottom locked
QC36 "061-110000-0" SOT-23 117.75,239.25 r270 bottom locked
QC37 "061-110000-0" SOT-23 19,240.25 r180 bottom locked
QC38 "061-110000-0" SOT-23 76.5,242.5 r270 bottom locked
QC39 "NC" SOT-23 109.75,193.5 r90 top locked
QC40 "063-010010-0" "SOT-23 - 1" 20.75,168.75 r180 bottom locked
QC41 "063-010010-0" "SOT-23 - 1" 22.75,184.75 r270 bottom locked
QC42 "061-010000-0" SOT-23 25.75,211 r0 bottom locked
QC43 "061-110000-0" SOT-23 29.25,209 r90 bottom locked
QC44 "063-010000-0" SOT223#1 111,78.25 r0 top locked (schematic designator QA3)